# Altium PCB ELOP_V0.90.pcbdoc (part 1 of 2)
Units mm, origin at the board's own origin, x right, y up, seen from the top; angles counter-clockwise.
Board outline 80 x 80.13 mm, 4 copper layers (Top Layer, Mid-Layer 1, Mid-Layer 2, Bottom Layer); 239 components, 164 nets, 744 pads, 242 vias.
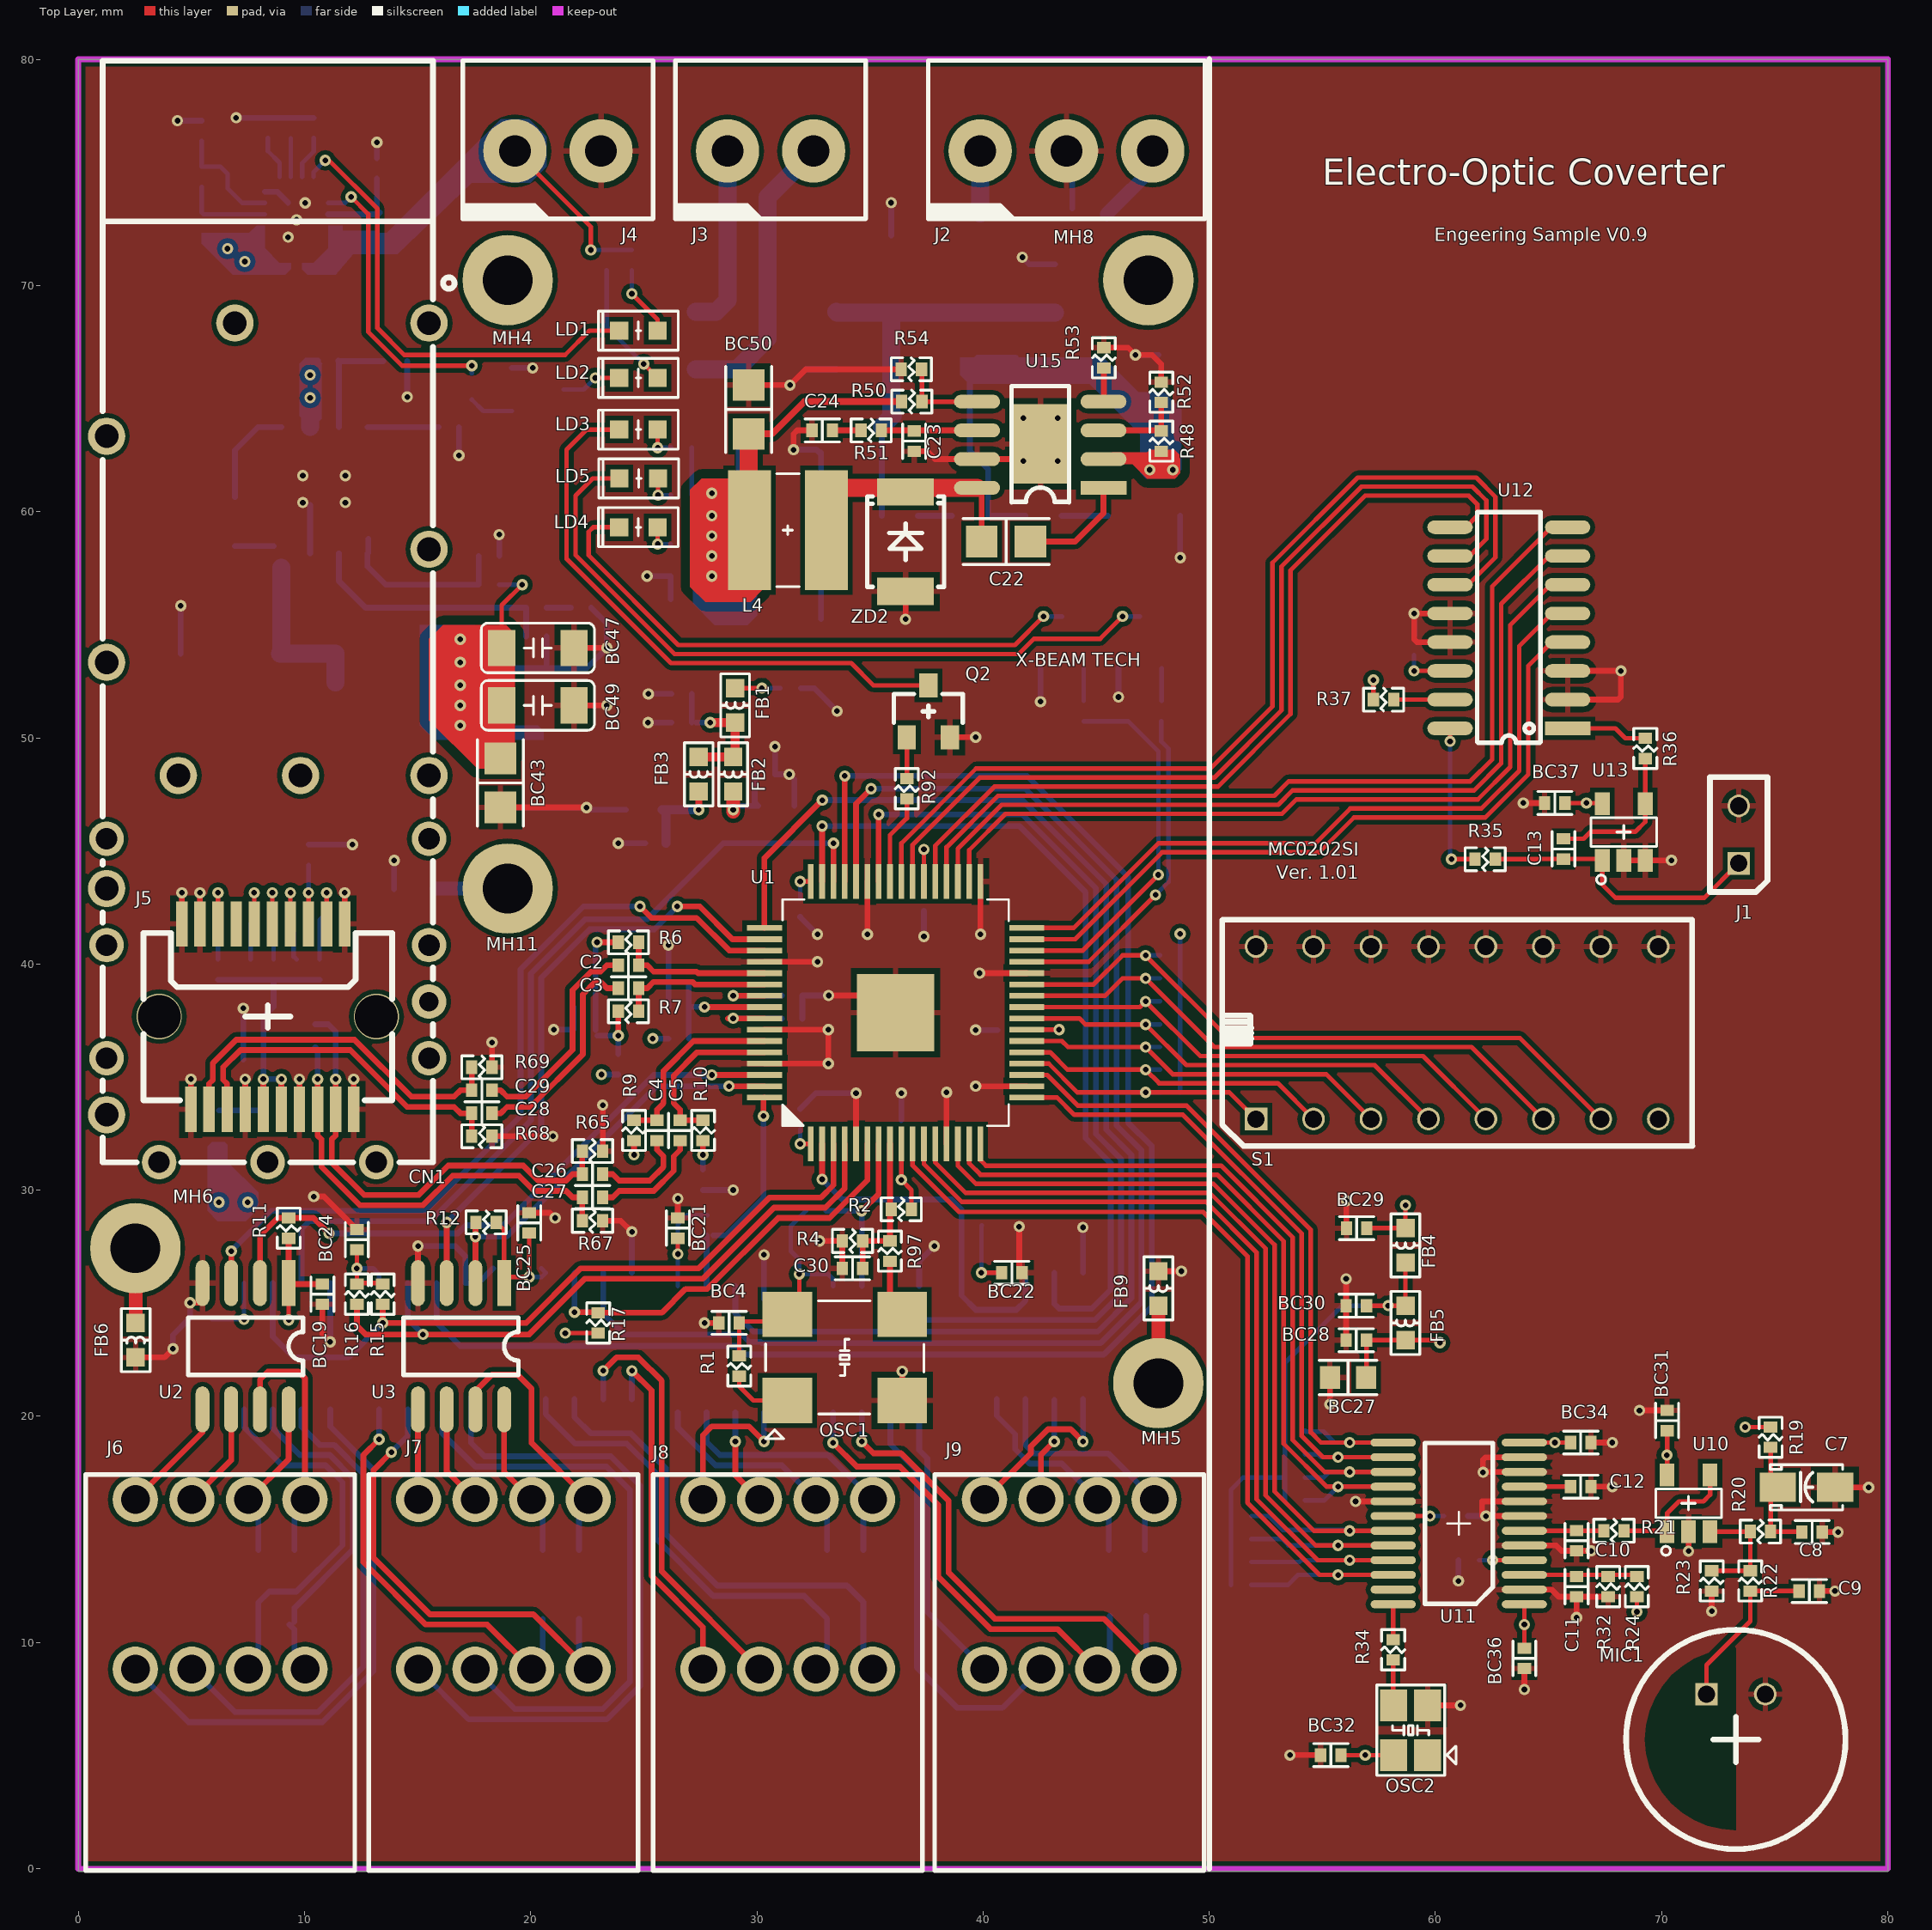
[diagram p0: Top Layer view]
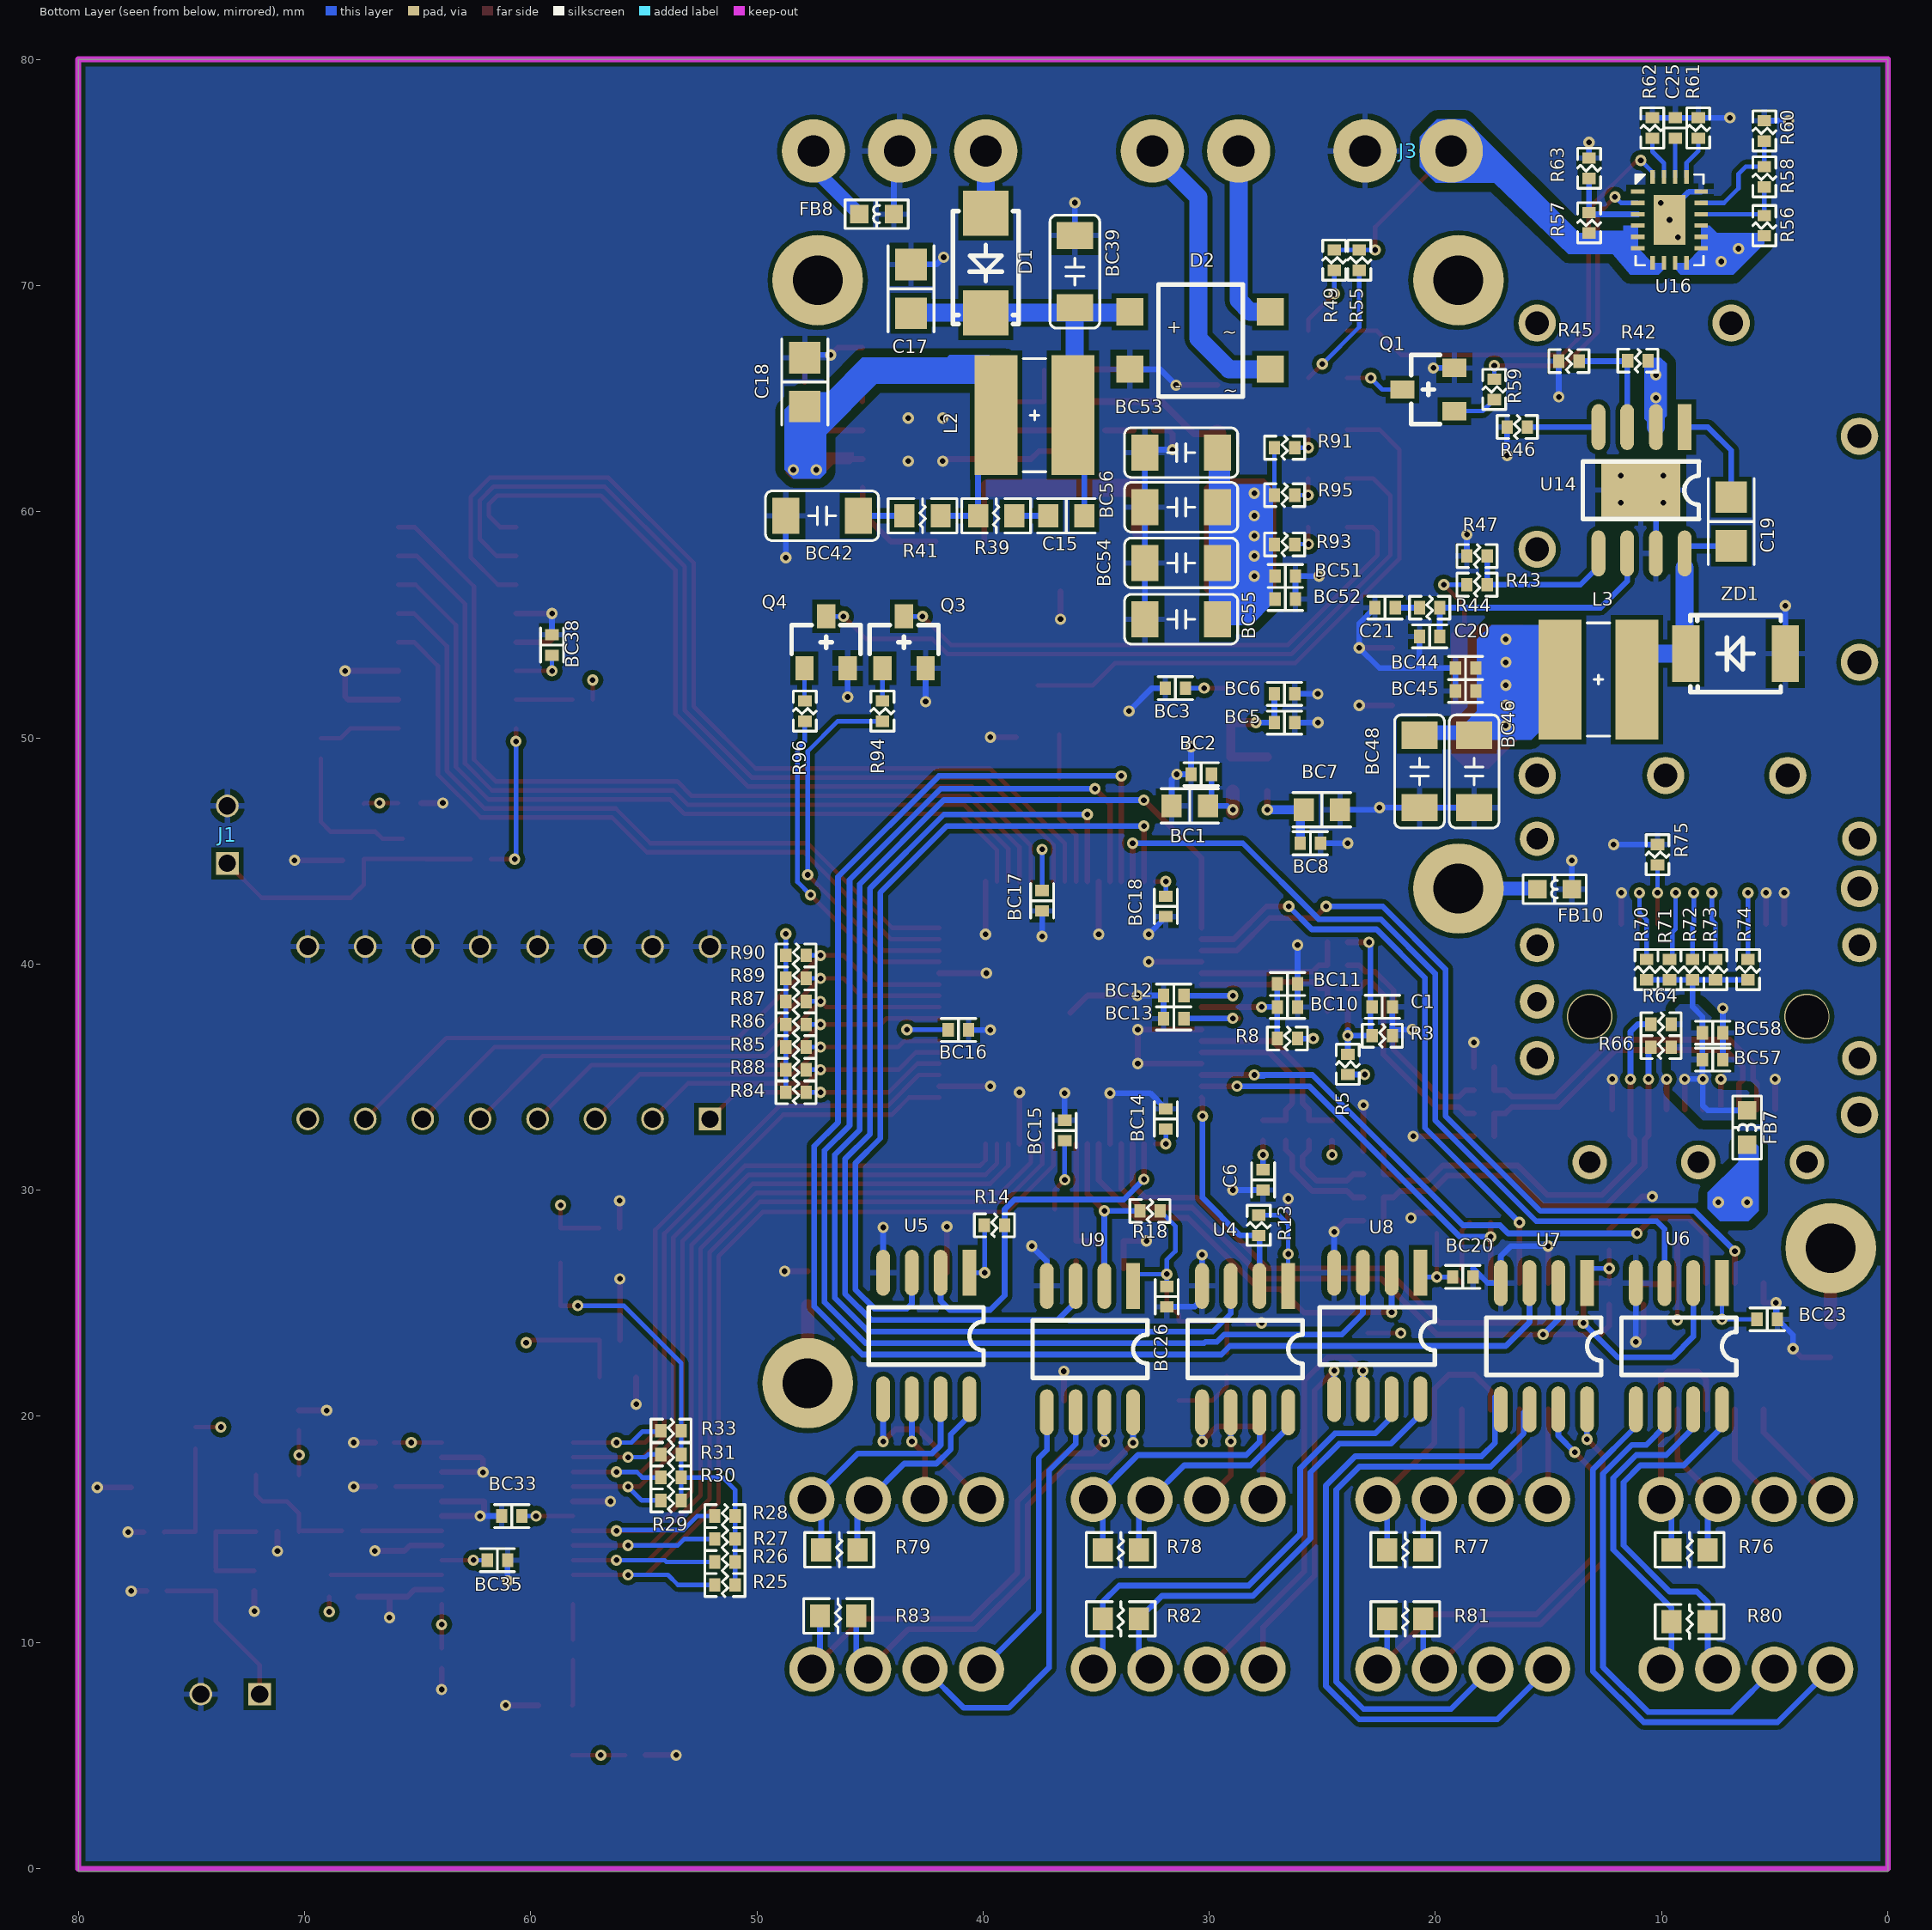
[diagram p1: Bottom Layer view, seen from below]
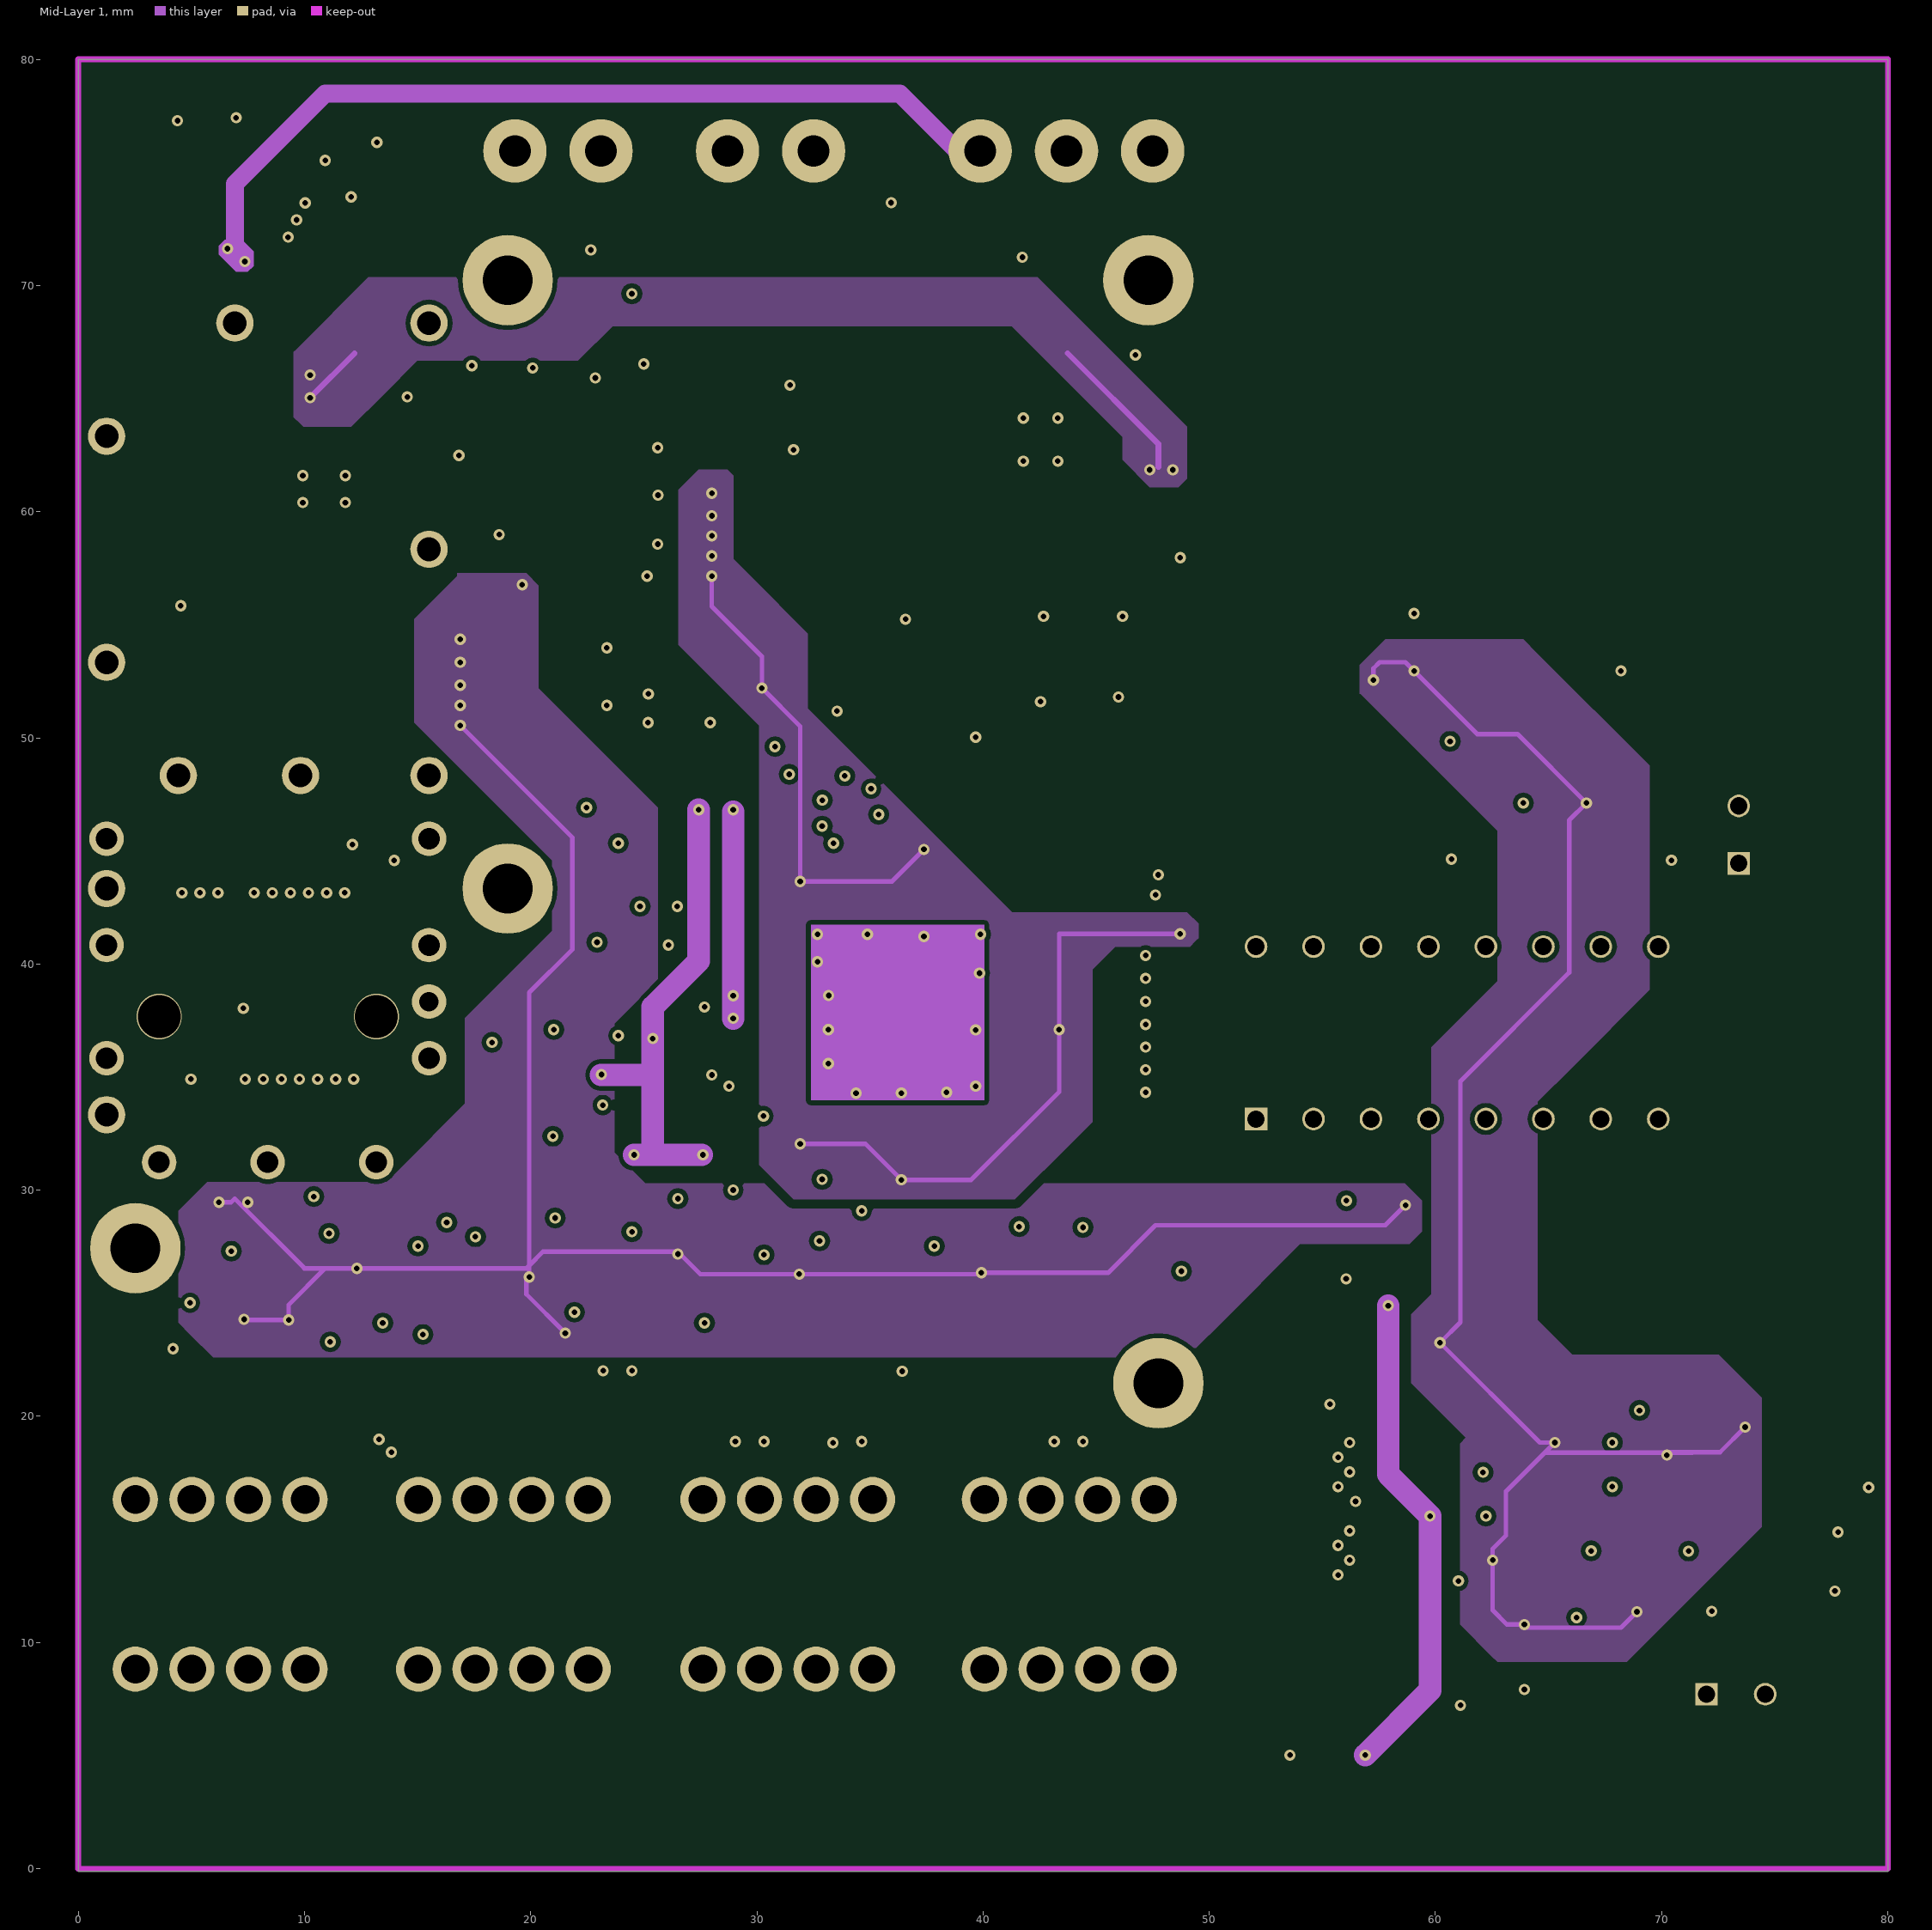
[diagram p2: Mid-Layer 1]
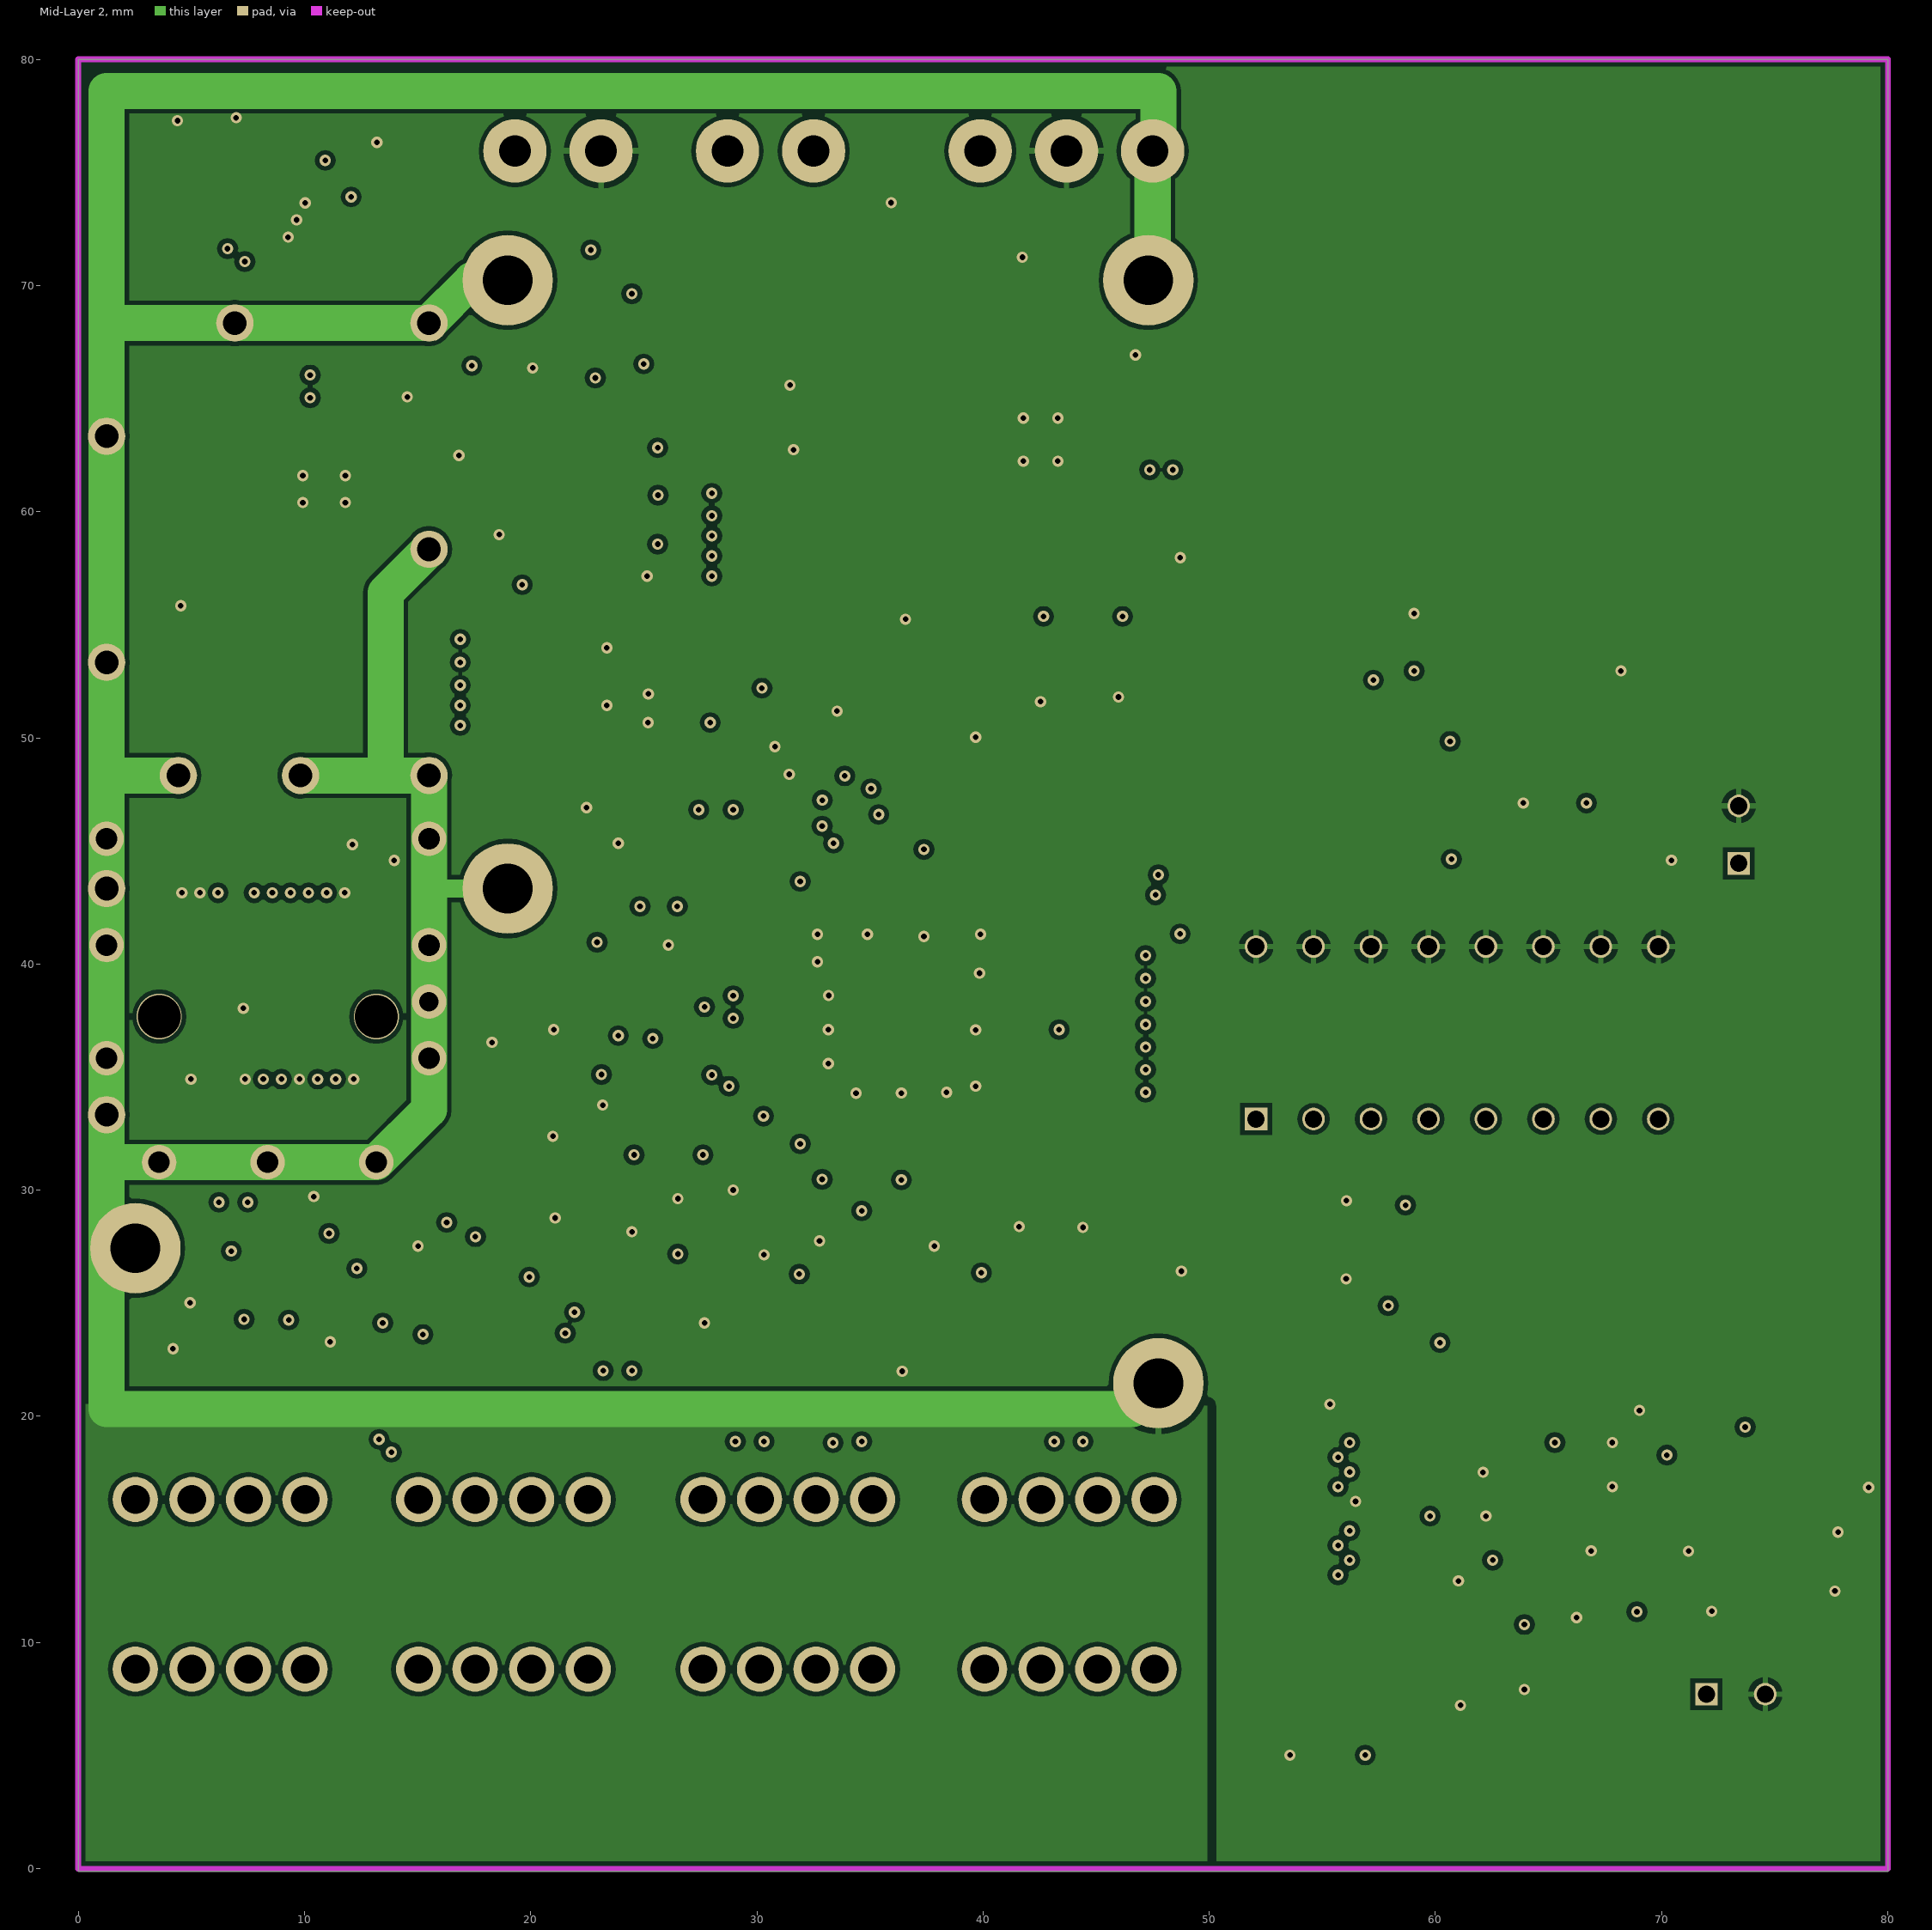
[diagram p3: Mid-Layer 2]

## Layer stack, top to bottom
Top Solder: solder mask 0.0102, Solder Resist, Dk 3.5
Top Layer: signal copper 0.0356
Dielectric1: dielectric 0.32, FR-4, Dk 4.8
Mid-Layer 1: signal copper 0.0356
Dielectric2: dielectric 0.32, FR-4, Dk 4.8
Mid-Layer 2: signal copper 0.0356
Dielectric3: dielectric 0.32, FR-4, Dk 4.8
Bottom Layer: signal copper 0.0356
Bottom Solder: solder mask 0.0102, Solder Resist, Dk 3.5

## Board outline
0,-0.127 80,-0.127 80,80 0,80

## Design rules (kind name [scope] priority, off if disabled: settings)
Clearance Clearance_2 [WithinRoom('RoomDefinition') vs IsTrack] p1: gap=0.1
Clearance Clearance_5 [isVia vs isRegion] p2: gap=0.2
Clearance Clearance_4 [isRegion vs IsRegion] p3: gap=0.4
Clearance Clearance_1 [isVia] p4: gap=0.1
Clearance [All] p5: gap=0.2
ComponentClearance ComponentClearance_2 [HasFootPrint('RS-1005') or HasFootPrint('CS-1005') vs HasFootPrint('RS-1005') or HasFootPrint('CS-1005')] p1: gap=0 collisioncheckmode=3 verticalgap=0 showdistances=FALSE
ComponentClearance ComponentClearance_1 [InComponent('CN1') vs InComponent('J5')] p2: gap=0 collisioncheckmode=3 verticalgap=0 showdistances=FALSE
ComponentClearance [All] p3: gap=0 collisioncheckmode=3 verticalgap=0.1 showdistances=FALSE
DiffPairsRouting [All] p1: maxlimit=0.254 minlimit=0.2 mostfreqgap=0.2 toplayer_minwidth=0.127 toplayer_maxwidth=0.381 toplayer_prefwidth=0.2 midlayer1_minwidth=0.127 midlayer1_maxwidth=0.381 midlayer1_prefwidth=0.2 midlayer2_minwidth=0.127 midlayer2_maxwidth=0.381 midlayer2_prefwidth=0.2 bottomlayer_minwidth=0.127 bottomlayer_maxwidth=0.381 bottomlayer_prefwidth=0.2 maxuncoupledlength=12.7
HoleSize [All] p1: absolutevalues=TRUE maxlimit=30 minlimit=0.025 maxpercent=80.000 minpercent=20.000
MinimumSolderMaskSliver MinimumSolderMaskSliver_3 [WithinRoom('RoomDefinition') vs WithinRoom('RoomDefinition')] p1: minsoldermaskwidth=0.04
MinimumSolderMaskSliver MinimumSolderMaskSliver_2 [isVia vs isVia] p2: minsoldermaskwidth=0.05
MinimumSolderMaskSliver MinimumSolderMaskSliver_1 [IsPad vs isPad] p3: minsoldermaskwidth=0.05
MinimumSolderMaskSliver [All] p4: minsoldermaskwidth=0.1
PolygonConnect PolygonConnect_1 [isVia] p1: connectstyle=Direct reliefconductorwidth=0.254 reliefentries=4 polygonreliefangle="90 Angle" airgapwidth=0.254
PolygonConnect [All] p2: connectstyle=Relief reliefconductorwidth=0.254 reliefentries=4 polygonreliefangle="90 Angle" airgapwidth=0.254
RoomDefinition [InComponentClass('Components Class 1')] p1: confinementstyle=ConfineIn formatcopy=TRUE lockcomponents=FALSE outline 29.337,44.577 42.926,44.577 42.926,31.083 29.337,31.083
RoutingVias [All] p1: holewidth=0.25 width=0.5 viastyle="Through Hole" minholewidth=0.25 minwidth=0.5 maxholewidth=0.25 maxwidth=0.5
SilkToSilkClearance [All] p1: silktosilkclearance=0.01
SilkToSolderMaskClearance [IsPad] p1: minsilkscreentomaskgap=0 clearancetoexposedcopper=TRUE
SolderMaskExpansion [All] p1: expansion=0.102
Width Width_2 [InNet('AGND')] p1: maxlimit=6 minlimit=0.254 preferedwidth=0.254
Width Width_1 [InNetClass('ETH')] p2: maxlimit=0.2 minlimit=0.127 preferedwidth=0.178
Width [All] p3: maxlimit=1 minlimit=0.127 preferedwidth=0.2
23 further rules are at their usual default settings.

## Classes and differential pairs
component class "Components Class 1": BC12 BC13 BC14 BC15 BC16 BC17 BC18
differential pair D_R422TX7: +R422TX_P7 -R422TX_N7
differential pair D_R422TX6: +R422TX_P6 -R422TX_N6
differential pair D_R422TX5: +R422TX_P5 -R422TX_N5
differential pair D_R422TX4: +R422TX_P4 -R422TX_N4
differential pair D_R422TX3: +R422TX_P3 -R422TX_N3
differential pair D_R422TX2: +R422TX_P2 -R422TX_N2
differential pair D_R422TX1: +R422TX_P1 -R422TX_N1
differential pair D_R422TX0: +R422TX_P0 -R422TX_N0
differential pair D_R422RX7: +R422RX_P7 -R422RX_N7
differential pair D_R422RX6: +R422RX_P6 -R422RX_N6
differential pair D_R422RX5: +R422RX_P5 -R422RX_N5
differential pair D_R422RX4: +R422RX_P4 -R422RX_N4
differential pair D_R422RX3: +R422RX_P3 -R422RX_N3
differential pair D_R422RX2: +R422RX_P2 -R422RX_N2
differential pair D_R422RX1: +R422RX_P1 -R422RX_N1
differential pair D_R422RX0: +R422RX_P0 -R422RX_N0
differential pair D_HSOX: +HSOX_P -HSOX_N
differential pair D_HSO: +HSO_P -HSO_N
differential pair D_HSIX: +HSIX_P -HSIX_N
differential pair D_HSI: +HSI_P -HSI_N
differential pair D_SFP0_TX: +SFP0_TX_P -SFP0_TX_N
differential pair D_SFP0_RX: +SFP0_RX_P -SFP0_RX_N

## Components (designator, comment, footprint, x,y, rotation, side; value= is the part's Value field where it differs from the comment)
BC1 "4.7uF" CS-1608#1 30.861,46.99 r0 bottom
BC2 "0.1uF" CS-1005#1 30.353,48.387 r0 bottom
BC3 "0.1uF" CS-1005#1 31.496,52.197 r0 bottom
BC4 "0.1uF" CS-1005#1 28.771,24.13 r180 top
BC5 "0.1uF" CS-1005#1 26.67,50.673 r180 bottom
BC6 "0.1uF" CS-1005#1 26.67,51.943 r180 bottom
BC7 "4.7uF" CS-1608#2 25.019,46.818 r0 bottom
BC8 "0.1uF" CS-1005#1 25.527,45.339 r180 bottom
BC10 "10nF" CS-1005#1 26.543,38.1 r180 bottom
BC11 "0.1uF" CS-1005#1 26.543,39.116 r180 bottom
BC12 "0.1uF" CS-1005#1 31.565,38.608 r0 bottom
BC13 "0.1uF" CS-1005#1 31.565,37.583 r0 bottom
BC14 "0.1uF" CS-1005#1 31.919,33.147 r90 bottom
BC15 "0.1uF" CS-1005#1 36.391,32.639 r90 bottom
BC16 "0.1uF" CS-1005#1 41.09,37.084 r180 bottom
BC17 "0.1uF" CS-1005#1 37.387,42.799 r270 bottom
BC18 "0.1uF" CS-1005#1 31.919,42.545 r270 bottom
BC19 "0.1uF" CS-1005#1 10.795,25.4 r270 top
BC20 "0.1uF" CS-1005#1 18.789,26.162 r180 bottom
BC21 "0.1uF" CS-1005#1 26.509,28.321 r90 top
BC22 "0.1uF" CS-1005#1 41.275,26.348 r0 top
BC23 "0.1uF" CS-1005#1 5.334,24.291 r180 bottom
BC24 "0.1uF" CS-1005#1 12.319,27.813 r90 top
BC25 "0.1uF" CS-1005#1 19.939,28.551 r90 top
BC26 "0.1uF" CS-1005#1 31.877,25.295 r270 bottom
BC27 "4.7uF" CS-1608#2 56.134,21.717 r0 top
BC28 "0.1uF" CS-1005#1 56.501,23.368 r180 top
BC29 "0.1uF" CS-1005#1 56.515,28.321 r180 top
BC30 "0.1uF" CS-1005#1 56.501,24.892 r180 top
BC31 "0.1uF" CS-1005#1 70.241,19.812 r90 top
BC32 "0.1uF" CS-1005#1 55.372,5.022 r180 top
BC33 "0.1uF" CS-1005#1 60.833,15.591 r0 bottom
BC34 "0.1uF" CS-1005#1 66.421,18.841 r0 top
BC35 "0.1uF" CS-1005#1 61.468,13.641 r180 bottom
BC36 "0.1uF" CS-1005#1 63.931,9.299 r270 top
BC37 "0.1uF" CS-1005#1 65.278,47.117 r180 top
BC38 "0.1uF" CS-1005#1 59.055,54.102 r90 bottom
BC39 "4.7uF/100V" CS-3216#1 35.941,70.612 r90 bottom
BC42 "4.7uF/100V" CS-3216#2 47.117,59.817 r180 bottom
BC43 "10uF" CS-2012 18.669,48.006 r270 top
BC44 "0.1uF" CS-1005#1 18.669,53.086 r0 bottom
BC45 "10nF" CS-1005#2 18.669,52.07 r180 bottom
BC46 "22uF" CS-3216#1 18.288,48.514 r270 bottom
BC47 "22uF" CS-3216#1 20.32,53.975 r0 top
BC48 "22uF" CS-3216#2 20.706,48.514 r90 bottom
BC49 "22uF" CS-3216#2 20.32,51.435 r180 top
BC50 "10uF" CS-2012 29.642,64.516 r90 top
BC51 "0.1uF" CS-1005#1 26.64,57.15 r180 bottom
BC52 "10nF" CS-1005#1 26.64,56.134 r180 bottom
BC53 "22uF" CS-3216#1 31.242,62.611 r0 bottom
BC54 "22uF" CS-3216#1 31.242,57.734 r0 bottom
BC55 "22uF" CS-3216#1 31.242,55.245 r0 bottom
BC56 "22uF" CS-3216#1 31.242,60.198 r0 bottom
BC57 "0.1uF" CS-1005#1 7.747,35.77 r0 bottom
BC58 "1uF" CS-1005#1 7.747,36.957 r0 bottom
C1 "10nF" CS-1005#1 22.352,38.107 r180 bottom
C2 "10nF" CS-1005#1 24.326,39.944 r180 top
C3 "10nF" CS-1005#1 24.326,38.928 r180 top
C4 "10nF" CS-1005#1 25.588,32.639 r270 top
C5 "10nF" CS-1005#1 26.612,32.639 r270 top
C6 "10nF" CS-1005#1 27.62,30.456 r270 bottom
C7 "22uF" CTS-3216 76.398,16.859 r0 top
C8 "0.1uF" CS-1005#1 76.652,14.885 r0 top
C9 "33pF" CS-1005#1 76.525,12.276 r0 top
C10 "3.3nF" CS-1005#1 66.238,14.504 r270 top
C11 "0.1uF" CS-1005#1 66.238,12.472 r90 top
C12 "0.1uF" CS-1005#1 66.421,16.891 r180 top
C13 "10pF" CS-1005#1 65.659,45.085 r90 top
C15 "0.1uF" CS-1608#1 36.322,59.817 r0 bottom
C17 "0.1uF//100V" CS-2012 43.18,69.85 r90 bottom
C18 "0.1uF//100V" CS-2012 47.879,65.728 r90 bottom
C19 "0.1uF//100V" CS-2012 6.927,59.563 r270 bottom
C20 "47pF" CS-1005#1 20.256,54.483 r180 bottom
C21 "4.7nF" CS-1005#1 22.225,55.753 r180 bottom
C22 "0.1uF//100V" CS-2012 41.021,58.674 r180 top
C23 "47pF" CS-1005#1 36.957,63.119 r90 top
C24 "4.7nF" CS-1005#1 32.893,63.593 r0 top
C25 "1.5nF" CS-1005#1 9.398,76.963 r270 bottom
C26 "0.1uF" CS-1005#2 22.737,30.71 r0 top
C27 "0.1uF" CS-1005#2 22.737,29.686 r0 top
C28 "0.1uF" CS-1005#1 17.847,33.401 r180 top
C29 "0.1uF" CS-1005#1 17.847,34.417 r180 top
C30 "15pF" CS-1005#1 34.232,26.543 r180 top
CN1 "TH_HC-SFP-01L" TH_HC-SFP-01L 8.382,49.786 r180 top
D1 "RB051L-40" SOD-106 39.878,70.993 r270 bottom
D2 "MB6S" MB2S 30.48,67.564 r90 bottom
FB1 "600" LS-1608 29.038,51.435 r270 top
FB2 "600" LS-1608 28.956,48.387 r270 top
FB3 "600" LS-1608 27.432,48.387 r270 top
FB4 "600" LS-1608 58.674,27.559 r270 top
FB5 "600" LS-1608 58.674,24.13 r270 top
FB6 "600" LS-1608 2.54,23.368 r90 top
FB7 "600" LS-1608 6.223,32.768 r90 bottom
FB8 "600" LS-1608 44.704,73.152 r0 bottom
FB9 "600" LS-1608 47.752,25.654 r270 top
FB10 "600" LS-1608 14.732,43.307 r0 bottom
J1 "Header_2.54_2p" Header_2.54_2p 73.406,44.45 r270 bottom
J2 "KF2EDGR-3.81-3P" KF2EDGV-3.81-3P 39.878,75.946 r0 top
J3 "CON 2P" KF2EDGV-3.81-2P#1 19.304,75.946 r180 bottom
J4 "CON 2P" KF2EDGV-3.81-2P#2 28.702,75.946 r0 top
J5 "KSP20LG154" KSP20LG154 8.382,37.674 r180 top
J6 "KF2EDGRH-2.5-4pX2" KF2EDGRH-2.5-4PX2 6.277,12.573 r0 top
J7 "KF2EDGRH-2.5-4pX2" KF2EDGRH-2.5-4PX2 18.796,12.573 r0 top
J8 "KF2EDGRH-2.5-4pX2" KF2EDGRH-2.5-4PX2 31.369,12.573 r0 top
J9 "KF2EDGRH-2.5-4pX2" KF2EDGRH-2.5-4PX2 43.815,12.573 r0 top
L2 "CDRH4D28-100" CDRH4D28NP 37.719,64.262 r90 bottom
L3 "CDRH4D28NP-7R4NC" CDRH4D28NP 12.793,52.578 r90 bottom
L4 "CDRH4D28NP-7R4NC" CDRH4D28NP 31.369,59.182 r90 top
LD1 "LED" LED1608 24.765,68.003 r0 top
LD2 "LED" LED1608 24.765,65.913 r0 top
LD3 "LED" LED1608 24.765,63.627 r0 top
LD4 "LED" LED1608 24.765,59.309 r0 top
LD5 "LED" LED1608 24.781,61.468 r0 top
MH4 "4.04pi" VA-2.2#1 18.986,70.231 r0 top
MH5 "4.04pi" VA-2.2#1 47.752,21.463 r0 top
MH6 "4.04pi" VA-2.2#1 2.527,27.432 r0 top
MH8 "4.04pi" VA-2.2#2 47.498,70.231 r0 top
MH11 "4.04pi" VA-2.2#1 18.986,43.336 r0 top
MIC1 "MIC9750" MIC9767 73.279,5.715 r0 top
OSC1 "SiT8008BI-82-25E-62.500000" SX7050 33.887,22.606 r180 top
OSC2 "25Mhz-SX32-3.3V" SX-32 58.906,6.122 r270 top
Q1 "MMBT6427/SOT-23" SOT-23 20.32,65.405 r0 bottom
Q2 "MMBT6427/SOT-23" SOT-23 37.587,51.181 r90 top
Q3 "MMBT6427/SOT-23" SOT-23 43.488,54.229 r90 bottom
Q4 "MMBT6427/SOT-23" SOT-23 46.935,54.229 r90 bottom
R1 "1K" RS-1005#1 29.225,22.225 r270 top
R2 "10K//NC" RS-1005#1 36.387,29.153 r180 top
R3 "825" RS-1005#1 22.352,36.83 r180 bottom
R4 "49.9" RS-1005#1 34.232,27.755 r180 top
R5 "200" RS-1005#1 23.876,35.562 r90 bottom
R6 "49.9" RS-1005#1 24.326,40.96 r180 top
R7 "49.9" RS-1005#1 24.326,37.912 r0 top
R8 "100" RS-1005#1 26.543,36.703 r180 bottom
R9 "49.9" RS-1005#1 24.572,32.639 r270 top
R10 "49.9" RS-1005#1 27.62,32.639 r90 top
R11 "10K" RS-1005#1 9.305,28.321 r270 top
R12 "10K" RS-1005#1 18.034,28.575 r0 top
R13 "10K" RS-1005#1 27.813,28.448 r90 bottom
R14 "10K" RS-1005#1 39.497,28.448 r0 bottom
R15 "10K" RS-1005#1 13.462,25.4 r90 top
R16 "10K" RS-1005#1 12.319,25.4 r90 top
R17 "10K" RS-1005#1 22.987,24.13 r270 top
R18 "10K" RS-1005#1 32.619,29.083 r180 bottom
R19 "4.7K" RS-1005#1 74.816,19.076 r90 top
R20 "2K" RS-1005#1 74.366,14.905 r0 top
R21 "500" RS-1005#1 67.889,14.941 r0 top
R22 "10" RS-1005#1 73.916,12.726 r270 top
R23 "10K" RS-1005#1 72.213,12.726 r90 top
R24 "110" RS-1005#1 68.905,12.472 r270 top
R25 "10K" RS-1005#1 51.411,12.545 r0 bottom
R26 "10K" RS-1005#1 51.411,13.561 r0 bottom
R27 "10K" RS-1005#1 51.411,14.577 r0 bottom
R28 "10K" RS-1005#1 51.411,15.593 r0 bottom
R29 "10K" RS-1005#1 53.792,16.282 r0 bottom
R30 "10K" RS-1005#1 53.792,17.298 r0 bottom
R31 "10K" RS-1005#1 53.792,18.314 r0 bottom
R32 "110" RS-1005#1 67.635,12.472 r90 top
R33 "10K" RS-1005#1 53.792,19.364 r0 bottom
R34 "10" RS-1005#1 58.131,9.678 r90 top
R35 "1K" RS-1005#1 62.201,44.633 r180 top
R36 "0" RS-1005#1 69.276,49.53 r90 top
R37 "2K" RS-1005#1 57.706,51.689 r0 top
R39 "47" RS-1608 39.419,59.817 r180 bottom
R41 "0.47" RS-1608 42.672,59.817 r180 bottom
R42 "30K" RS-1005#1 11.052,66.675 r0 bottom
R43 "32.4K_F" RS-1005#1 18.161,56.769 r180 bottom
R44 "16.9K" RS-1005#1 20.256,55.753 r0 bottom
R45 "4.7K" RS-1005#1 14.097,66.654 r0 bottom
R46 "243K" RS-1005#1 16.383,63.74 r0 bottom
R47 "10.2K_F" RS-1005#1 18.161,58.039 r0 bottom
R48 "30K" RS-1005#1 47.879,63.119 r90 top
R49 "4.7K" RS-1005#1 24.473,71.12 r270 bottom
R50 "32.4K_F" RS-1005#1 36.85,64.863 r0 top
R51 "16.9K" RS-1005#1 35.052,63.593 r180 top
R52 "4.7K" RS-1005#1 47.879,65.278 r90 top
R53 "243K" RS-1005#1 45.339,66.802 r90 top
R54 "15K_F" RS-1005#1 36.83,66.294 r180 top
R55 "4.7K" RS-1005#1 23.368,71.12 r270 bottom
R56 "475K" RS-1005#1 5.461,72.644 r90 bottom
R57 "475K" RS-1005#1 13.208,72.771 r90 bottom
R58 "16.7K" RS-1005#1 5.461,74.804 r90 bottom
R59 "1K" RS-1005#1 17.399,65.405 r270 bottom
R60 "31.2K" RS-1005#1 5.461,76.836 r90 bottom
R61 "17,8K" RS-1005#1 8.382,76.963 r90 bottom
R62 "19.1K" RS-1005#1 10.414,76.963 r90 bottom
R63 "47K" RS-1005#1 13.208,75.185 r90 bottom
R64 "10K" RS-1005#1 10.027,37.338 r180 bottom
R65 "10K" RS-1005#1 22.737,31.726 r180 top
R66 "10K" RS-1005#1 10.027,36.322 r180 bottom
R67 "10K" RS-1005#1 22.737,28.649 r180 top
R68 "10K" RS-1005#1 17.847,32.385 r180 top
R69 "10K" RS-1005#1 17.847,35.433 r180 top
R70 "10K" RS-1005#1 10.668,39.753 r270 bottom
R71 "10K" RS-1005#1 9.652,39.753 r270 bottom
R72 "10K" RS-1005#1 8.636,39.753 r270 bottom
R73 "10K" RS-1005#1 7.62,39.753 r270 bottom
R74 "10K" RS-1005#1 6.182,39.753 r270 bottom
R75 "1K" RS-1005#1 10.182,44.831 r270 bottom
R76 "120" RS-1608 8.763,14.097 r180 bottom
R77 "120" RS-1608 21.336,14.097 r180 bottom
R78 "120" RS-1608 33.909,14.097 r180 bottom
R79 "120" RS-1608 46.355,14.097 r180 bottom
R80 "120" RS-1608 8.763,10.922 r180 bottom
R81 "120" RS-1608 21.336,11.049 r180 bottom
R82 "120" RS-1608 33.909,11.049 r180 bottom
R83 "120" RS-1608 46.41,11.176 r180 bottom
R84 "10K" RS-1005#2 48.265,34.327 r0 bottom
R85 "10K" RS-1005#2 48.265,36.327 r0 bottom
R86 "10K" RS-1005#1 48.265,37.327 r180 bottom
R87 "10K" RS-1005#1 48.265,38.347 r180 bottom
R88 "10K" RS-1005#1 48.265,35.327 r180 bottom
R89 "10K" RS-1005#1 48.265,39.363 r180 bottom
R90 "10K" RS-1005#1 48.265,40.379 r180 bottom
R91 "4.7K" RS-1005#1 26.67,62.827 r180 bottom
R92 "1K" RS-1005#1 36.633,47.752 r90 top
R93 "4.7K" RS-1005#1 26.67,58.547 r180 bottom
R94 "1K" RS-1005#1 44.447,51.181 r90 bottom
R95 "4.7K" RS-1005#1 26.67,60.728 r180 bottom
R96 "1K" RS-1005#1 47.879,51.181 r90 bottom
R97 "33" RS-1005#1 35.883,27.305 r90 top
S1 "SW DIP-8" DIP_SW_8C 52.07,33.147 r0 top
U1 "TLK1501RCP" PQFP-G64 36.137,37.846 r90 top
U2 "MAX3490CSA" SOIC-8#1 7.366,23.114 r180 top
U3 "MAX3490CSA" SOIC-8#2 16.891,23.114 r0 top
U4 "MAX3490CSA" SOIC-8#2 28.448,22.987 r180 bottom
U5 "MAX3490CSA" SOIC-8#1 42.545,23.568 r0 bottom
U6 "MAX3490CSA" SOIC-8#1 9.271,23.114 r0 bottom
U7 "MAX3490CSA" SOIC-8#1 15.24,23.114 r0 bottom
U8 "MAX3490CSA" SOIC-8#1 22.606,23.568 r0 bottom
U9 "MAX3490CSA" SOIC-8#1 35.306,22.987 r0 bottom
U10 "OPA340NA" SOT23-5 71.191,16.155 r0 top
U11 "AD08060" TSSOP-24 61.031,15.266 r180 top
U12 "TLC7524" SOP-16 63.246,54.864 r270 top
U13 "OPA340NA" SOT23-5 68.326,45.833 r0 top
U14 "TPS54560" SOIC-8E 10.922,60.96 r0 bottom
U15 "TPS54560" SOIC-8E 42.545,62.992 r90 top
U16 "TPS25940L" WQFN20-4x3 9.652,72.899 r270 bottom
ZD1 "PMEG6045ETP" SOD-128 6.731,53.721 r0 bottom
ZD2 "PMEG6045ETP" SOD-128 36.576,58.674 r90 top

## Footprints (in the part's own frame and the unit in brackets; to place one, negate y for a bottom-side part, rotate by r counter-clockwise, add the part's x,y. Pads: shape width x height; smd on the part's side, far side on the other; paste and mask are expansions set on the pad)
CDRH4D28NP [mm]
  rect 5.3x1.9 smd: 1(0,-1.7) 2(0,1.7)
  silkscreen extent -2.5,-0.5 2.5,0.5
CS-1005#1 [mm]
  rect 0.5x0.6 smd: 1(-0.45,0) 2(0.45,0)
  silkscreen extent -0.76,-0.51 0.76,0.51
CS-1005#2 [mm]
  rect 0.5x0.6 smd: 1(0.45,0) 2(-0.45,0)
  silkscreen extent -0.76,-0.51 0.76,0.51
CS-1608#1 [mil]
  rect 35x40 smd: 1(-31.5,0) 2(31.5,0)
  silkscreen extent -50,-30 50,30
CS-1608#2 [mil]
  rect 35x40 smd: 1(31.5,0) 2(-31.5,0)
  silkscreen extent -50,-30 50,30
CS-2012 [mil]
  rect 55x55 smd: 1(-42.5,0) 2(42.5,0)
  silkscreen extent -75,-40 75,40
CS-3216#1 [mm]
  rect 1.2x1.6 smd: 1(-1.6,0) 2(1.6,0)
  silkscreen extent -2.5,-1.1 2.5,1.1
CS-3216#2 [mm]
  rect 1.2x1.6 smd: 1(1.6,0) 2(-1.6,0)
  silkscreen extent -2.5,-1.1 2.5,1.1
CTS-3216 [mil]
  rect 63x51 smd: 1(-50,0) 2(50,0)
  silkscreen extent -63,-39 63,39
DIP_SW_8C [mm]
  rect 1x1 hole 0.762: 1(0,0)
  round 1 hole 0.762: 2(2.54,0) 3(5.08,0) 4(7.62,0) 5(10.16,0) 6(12.7,0) 7(15.24,0) 8(17.78,0) 9(17.78,7.62) 10(15.24,7.62) 11(12.7,7.62) 12(10.16,7.62) 13(7.62,7.62) 14(5.08,7.62) 15(2.54,7.62) 16(0,7.62)
  silkscreen extent -1.5,-1.19 19.3,8.81
Header_2.54_2p [mm]
  rect 1x1 hole 0.762: 1(0,0)
  round 1 hole 0.762: 2(-2.54,0)
KF2EDGRH-2.5-4PX2 [mm]
  round 2 hole 1.27: A1(-3.75,3.75) A2(-1.25,3.75) A3(1.25,3.75) A4(3.75,3.75) B1(-3.75,-3.75) B2(-1.25,-3.75) B3(1.25,-3.75) B4(3.75,-3.75)
  silkscreen extent -5.95,-12.65 5.95,4.85
KF2EDGV-3.81-2P#1 [mm]
  round 2.8 hole 1.4: 1(0,0) 2(-3.81,0)
KF2EDGV-3.81-2P#2 [mm]
  round 2.8 hole 1.4: 1(0,0) 2(3.81,0)
  silkscreen extent -2.3,-3 6.11,4
KF2EDGV-3.81-3P [mm]
  round 2.8 hole 1.4: 1(0,0) 2(3.81,0) 3(7.62,0)
  silkscreen extent -2.3,-3 9.92,4
KSP20LG154 [mm]
  rect 0.5x2 smd paste+0 mask+0.051: 1(-3.4,-4.1) 2(-2.6,-4.1) 3(-1.8,-4.1) 4(-1,-4.1) 5(-0.2,-4.1) 6(0.6,-4.1) 7(1.4,-4.1) 8(2.2,-4.1) 9(3,-4.1) 10(3.8,-4.1) 11(3.4,4.1) 12(2.6,4.1) 13(1.8,4.1) 14(1,4.1) 15(0.2,4.1) 16(-0.6,4.1) 17(-1.4,4.1) 18(-2.2,4.1) 19(-3,4.1) 20(-3.8,4.1)
  silkscreen extent -5.5,-3.7 5.5,3.7
LED1608 [mm]
  rect 0.8x0.8 smd paste+0 mask+0.051: 1(0.851,0) 2(-0.851,0)
  silkscreen extent -1.77,-0.86 1.77,0.86
LS-1608 [mil]
  rect 32x32 smd: 1(-30,0) 2(30,0)
  silkscreen extent -55,-25 55,25
MB2S [mm]
  rect 1.2x1.2 smd: 1(-1.269,-3.173) 2(1.271,-3.173) 3(1.271,3.027) 4(-1.269,3.027)
  silkscreen extent -2.47,-1.96 2.47,1.77
MIC9767 [mm]
  rect 1x1 hole 0.762: 1(-1.3,2)
  round 1 hole 0.762: 2(1.3,2)
  Top Layer pour cut-out: 0,4 -1.736,3.604 -3.127,2.494 -3.9,0.89 -3.9,-0.89 -3.127,-2.494 -1.736,-3.604 0,-4 0,-4
  silkscreen extent -4.85,-4.85 4.85,4.85
PQFP-G64 [mm]
  rect 1.55x0.25 smd: 1(-5.8,3.75) 2(-5.8,3.25) 3(-5.8,2.75) 4(-5.8,2.25) 5(-5.8,1.75) 6(-5.8,1.25) 7(-5.8,0.75) 8(-5.8,0.25) 9(-5.8,-0.25) 10(-5.8,-0.75) 11(-5.8,-1.25) 12(-5.8,-1.75) 13(-5.8,-2.25) 14(-5.8,-2.75) 15(-5.8,-3.25) 16(-5.8,-3.75) 33(5.8,-3.75) 34(5.8,-3.25) 35(5.8,-2.75) 36(5.8,-2.25) 37(5.8,-1.75) 38(5.8,-1.25) 39(5.8,-0.75) 40(5.8,-0.25) 41(5.8,0.25) 42(5.8,0.75) 43(5.8,1.25) 44(5.8,1.75) 45(5.8,2.25) 46(5.8,2.75) 47(5.8,3.25) 48(5.8,3.75)
  rect 0.25x1.55 smd: 17(-3.75,-5.8) 18(-3.25,-5.8) 19(-2.75,-5.8) 20(-2.25,-5.8) 21(-1.75,-5.8) 22(-1.25,-5.8) 23(-0.75,-5.8) 24(-0.25,-5.8) 25(0.25,-5.8) 26(0.75,-5.8) 27(1.25,-5.8) 28(1.75,-5.8) 29(2.25,-5.8) 30(2.75,-5.8) 31(3.25,-5.8) 32(3.75,-5.8) 49(3.75,5.8) 50(3.25,5.8) 51(2.75,5.8) 52(2.25,5.8) 53(1.75,5.8) 54(1.25,5.8) 55(0.75,5.8) 56(0.25,5.8) 57(-0.25,5.8) 58(-0.75,5.8) 59(-1.25,5.8) 60(-1.75,5.8) 61(-2.25,5.8) 62(-2.75,5.8) 63(-3.25,5.8) 64(-3.75,5.8)
  rect 3.42x3.42 smd mask+2.4: 65(0,0)
  silkscreen extent -5,-5 5,5
RS-1005#1 [mm]
  rect 0.5x0.6 smd: 1(-0.45,0) 2(0.45,0)
  silkscreen extent -0.89,-0.51 0.89,0.51
RS-1005#2 [mm]
  rect 0.5x0.6 smd: 1(0.45,0) 2(-0.45,0)
  silkscreen extent -0.89,-0.51 0.89,0.51
RS-1608 [mil]
  rect 35x40 smd: 1(-31.5,0) 2(31.5,0)
  silkscreen extent -60,-30 60,30
SOD-106 [mm]
  rrect0% 2x2 smd: 1(-2.2,0) 2(2.2,0)
  silkscreen extent -2.3,-1.45 2.7,1.45
SOD-128 [mm]
  rrect0% 1.2x2.5 smd: 1(-2.2,0) 2(2.2,0)
  silkscreen extent -2,-1.7 2,1.7
SOIC-8#1 [mil]
  rect 24x80 smd: 1(-76.34,-109.45)
  oval 24x80 smd: 2(-26.34,-109.45) 3(23.66,-109.45) 4(73.66,-109.45) 5(73.66,110.55) 6(23.66,110.55) 7(-26.34,110.55) 8(-76.34,110.55)
  silkscreen extent -101,-49 99,51
SOIC-8#2 [mil]
  rect 24x80 smd: 1(76.34,109.45)
  oval 24x80 smd: 2(26.34,109.45) 3(-23.66,109.45) 4(-73.66,109.45) 5(-73.66,-110.55) 6(-23.66,-110.55) 7(26.34,-110.55) 8(76.34,-110.55)
  silkscreen extent -99,-51 101,49
SOIC-8E [mil]
  rect 24x80 smd: 1(-76.34,-109.45)
  oval 24x80 smd: 2(-26.34,-109.45) 3(23.66,-109.45) 4(73.66,-109.45) 5(73.66,110.55) 6(23.66,110.55) 7(-26.34,110.55) 8(-76.34,110.55)
  rect 138.19x103.15 smd: 9(0,0)
  silkscreen extent -101,-49 101,51
SOP-16 [mm]
  rect 0.6x2 smd: 1(4.445,2.6)
  oval 0.6x2 smd: 2(3.175,2.6) 3(1.905,2.6) 4(0.635,2.6) 5(-0.635,2.6) 6(-1.905,2.6) 7(-3.175,2.6) 8(-4.445,2.6) 9(-4.445,-2.6) 10(-3.175,-2.6) 11(-1.905,-2.6) 12(-0.635,-2.6) 13(0.635,-2.6) 14(1.905,-2.6) 15(3.175,-2.6) 16(4.445,-2.6)
  silkscreen extent -5.12,-1.4 5.08,1.4
SOT23-5 [mm]
  rect 0.65x1.001 smd: 1(-0.95,-1.25) 2(0,-1.25) 3(0.95,-1.25) 4(0.95,1.25) 5(-0.95,1.25)
  silkscreen extent -1.45,-2.3 1.45,0.64
SOT-23 [mil]
  rect 42x32 smd: 1(-45.45,37.75) 2(-45.45,-37.35) 3(44.85,0.2)
  silkscreen extent -20,-60 30,60
SX7050 [mm]
  rect 2.2x2 smd: 1(2.54,1.905) 2(-2.54,1.905) 3(-2.54,-1.905) 4(2.54,-1.905)
  silkscreen extent -3.5,-2.5 3.5,3.6
SX-32 [mm]
  rect 1.4x1.2 smd: 1(1.1,0.75) 2(-1.1,0.75) 3(-1.1,-0.75) 4(1.1,-0.75)
  silkscreen extent -2,-1.5 2,2
TH_HC-SFP-01L [mm]
  round 1.65 hole 1.05 paste+0 mask+0.05: 1(-7.125,-18.55) 2(-7.125,-8.55) 3(-7.125,1.45) 11(7.125,16.45) 14(7.125,6.45) 16(7.125,-3.55) 17(7.125,-13.55) 18(1.455,-18.55) 19(3.955,1.45) 20(-1.445,1.45)
  round 1.524 hole 0.95 paste+0 mask+0.05: 4(-7.125,4.25) 5(-7.125,8.95) 7(-7.125,13.95) 8(-4.795,18.55) 9(0.005,18.55) 10(4.805,18.55) 12(7.125,13.95) 13(7.125,8.95) 15(7.125,4.25)
  round 1.524 hole 0.85 paste+0 mask+0.05: 6(-7.125,11.45)
  silkscreen extent -8.26,-30.15 7.3,18.55
TSSOP-24 [mm] "TSOP, 16-Leads, Body 5x4.4mm, Pitch 0.65mm, IPC Low Density"
  oval 2x0.35 smd: 1(-2.9,3.575) 2(-2.9,2.925) 3(-2.9,2.275) 4(-2.9,1.625) 5(-2.9,0.975) 6(-2.9,0.325) 7(-2.9,-0.325) 8(-2.9,-0.975) 9(-2.9,-1.625) 10(-2.9,-2.275) 11(-2.9,-2.925) 12(-2.9,-3.575) 13(2.9,-3.575) 14(2.9,-2.925) 15(2.9,-2.275) 16(2.9,-1.625) 17(2.9,-0.975) 18(2.9,-0.325) 19(2.9,0.325) 20(2.9,0.975) 21(2.9,1.625) 22(2.9,2.275) 23(2.9,2.925) 24(2.9,3.575)
  silkscreen extent -1.5,-3.56 1.5,3.56
VA-2.2#1 [mm]
  rrect100% 4x4 hole 2.2: 1(0,0)
VA-2.2#2 [mm]
  rrect100% 4x4 hole 2.2: 1(-0.19,0)
WQFN20-4x3 [mm]
  rect 0.2x0.6 smd: 1(-1.25,-1.4) 2(-0.75,-1.4) 3(-0.25,-1.4) 4(0.25,-1.4) 5(0.75,-1.4) 6(1.25,-1.4) 11(1.25,1.4) 12(0.75,1.4) 13(0.25,1.4) 14(-0.25,1.4) 15(-0.75,1.4) 16(-1.25,1.4)
  rect 0.6x0.2 smd: 7(1.9,-0.75) 8(1.9,-0.25) 9(1.9,0.25) 10(1.9,0.75) 17(-1.9,0.75) 18(-1.9,0.25) 19(-1.9,-0.25) 20(-1.9,-0.75)
  rect 2.2x1.4 smd: 21(0,0)
  silkscreen extent -2,-1.5 2,1.5

## Via types
v1: diameter 0.5, hole 0.25, Top Layer to Bottom Layer, 240 vias
v2: diameter 2, hole 1.9, Top Layer to Bottom Layer, 2 vias

## Nets (pads, with @x,y where several pads share a name; then routed paths per layer and width w, separated by ;. In a path a pad name is that pad's centre, name@x,y a point inside that pad or via, vN(x,y) a via of type N, cw(c..) or ccw(c..) an arc to the next point about the centre after c; other vN are vias at no path point)
+2.5V: BC3.1 BC14.1 BC15.1 BC16.1 BC17.1 BC18.1 BC50.1 BC51.1 BC52.1 BC53.1 BC54.1 BC55.1 BC56.1 FB1.1 L4.2 R2.1 R50.1 R84.1 R85.1 R86.1 R87.1 R88.1 R89.1 R90.1 R91.1 R93.1 R95.1 U1.1 U1.9 U1.23 U1.38 U1.48 | length 83.9
  Top Layer w0.2: FB1.1@29.038,52.197 v1(30.226,52.197) ; v1(31.919,32.046) U1.1@32.387,32.046 ; v1(31.919,43.646) U1.48@32.387,43.646 ; U1.9@36.387,32.046 v1(36.387,30.456) 36.837,30.006 R2.1@36.837,29.153 ; U1.38@37.387,43.646 v1(37.387,45.065) ; U1.23@41.937,37.096 v1(43.364,37.096)
  Top Layer w0.3: BC50.1@29.642,63.437 30.67,63.437 32.097,64.863 R50.1@36.4,64.863
  Top Layer w0.8: L4.2@29.642,59.209 BC50.1@29.642,63.437
  Mid-Layer 1 w0.2: v1(28.009,57.15) 28.009,55.811 30.226,53.594 v1(30.226,52.197) 31.919,50.504 v1(31.919,43.646) 35.968,43.646 v1(37.387,45.065) ; v1(31.919,32.046) 34.797,32.046 v1(36.387,30.456) 39.473,30.456 43.364,34.347 v1(43.364,37.096) 43.364,41.345 ; 43.375,41.334 v1(48.715,41.334)
  Bottom Layer w0.2: R95.1@27.12,60.728 R91.1@27.12,62.827 ; BC53.1@29.388,62.357 BC53.1@29.642,62.611 ; v1(30.226,52.197) BC3.1@31.046,52.197 ; v1(31.919,32.046) BC14.1@31.919,32.697 ; BC18.1@31.919,42.895 v1(31.919,43.646) ; v1(36.387,30.456) 36.391,30.46 BC15.1@36.391,32.189 ; BC17.1@37.387,43.249 v1(37.387,45.065) ; BC16.1@41.552,37.096 v1(43.364,37.096) ; R84.1@48.715,34.327 R90.1@48.715,40.379 v1(48.715,41.334)
  other v1: 28.009,58.039 28.009,58.928 28.009,59.817 28.009,60.811
+3.3V: BC4.1 BC19.1 BC20.1 BC21.1 BC22.1 BC23.1 BC24.1 BC25.1 BC26.1 BC29.1 BC43.1 BC44.1 BC45.1 BC46.1 BC47.1 BC48.1 BC49.1 FB4.1 FB7.1 L3.2 OSC1.4 R1.1 R11.2 R12.2 R13.2 R14.2 R15.2 R16.2 R17.2 R18.2 R43.1 U2.1 U3.1 U4.1 U5.1 U6.1 U7.1 U8.1 U9.1 | length 142
  Top Layer w0.2: v1(9.305,24.263) U2.1@9.305,25.894 U2.1@9.349,25.85 ; R16.2@12.319,25.85 R16.2@12.319,25.894 ; BC24.1@12.319,27.363 v1(12.319,26.543) R16.2@12.319,25.894 ; R15.2@13.418,25.894 R16.2@12.319,25.894 ; R12.2@18.484,28.575 18.83,28.229 18.83,26.509 U3.1@18.864,26.543 ; BC47.1@18.72,53.975 18.72,55.861 v1(19.628,56.769) ; U3.1@18.83,25.894 19.098,26.162 v1(19.939,26.162) BC25.1@19.939,28.101 ; v1(21.532,23.68) R17.2@22.987,23.68 ; v1@26.509,27.281 BC21.1@26.509,27.871 ; R1.1@29.221,22.813 29.221,24.199 31.311,24.199 31.347,24.235 OSC1.4@31.347,24.511 31.877,25.041 v1(31.877,26.288) ; v1(39.927,26.348) BC22.1@40.698,26.348 ; BC29.1@56.965,28.321 FB4.1@58.674,28.321 v1(58.674,29.337)
  Top Layer w0.256: U2.1@9.305,25.894 R11.2@9.305,27.871 ; U2.1@9.349,25.85 BC19.1@10.795,25.85
  Mid-Layer 1 w0.2: v1(6.223,29.464) 6.758,29.464 6.919,29.625 10.001,26.543 10.922,26.543 ; v1(7.332,24.291) 7.36,24.263 v1(9.305,24.263) 9.305,24.926 10.922,26.543 ; v1(16.891,50.546) 21.844,45.593 21.844,40.64 19.939,38.735 19.939,26.67 ; v1@19.812,26.162 19.812,25.4 v1(21.532,23.68) ; v1(19.939,26.162) 19.939,26.67 ; v1(58.674,29.337) 57.785,28.448 47.625,28.448 45.525,26.348 v1(39.927,26.348) 39.867,26.288 v1(31.877,26.288) 27.502,26.288 26.509,27.281 20.55,27.281 19.939,26.67 ; 10.922,26.543 v1(12.319,26.543) 19.812,26.543 19.939,26.67
  Bottom Layer w0.2: BC23.1@5.911,24.291 v1(7.332,24.291) U6.1@7.332,25.894 ; v1(6.223,29.464) 6.758,29.464 6.919,29.625 6.223,30.321 FB7.1@6.223,32.006 ; v1(12.319,26.543) 13.046,26.543 13.301,26.288 U7.1@13.301,25.894 ; R43.1@18.611,56.769 v1(19.628,56.769) ; BC20.1@19.366,26.162 v1(19.939,26.162) 20.481,26.162 U8.1@20.667,26.348 U8.1@20.472,26.543 ; U4.1@26.509,25.767 v1(26.509,27.178) 26.509,28.483 26.924,28.898 R13.2@27.813,28.898 ; BC26.1@31.877,25.745 v1(31.877,26.288) ; R18.2@32.169,29.083 31.496,28.41 31.496,27.305 31.877,26.924 v1(31.877,26.288) ; U9.1@33.367,25.767 33.367,26.069 33.147,26.289 33.146,26.288 v1(31.877,26.288) ; R14.2@39.947,28.448 39.927,28.428 v1(39.927,26.348) U5.1@40.606,26.348
  other v1: 7.493,29.464 16.891,51.435 16.891,52.324 16.891,53.34 16.891,54.356
+12V: BC39.1 C15.1 C17.1 D1.2 D2.3 L2.1 | length 18.7
  Bottom Layer w0.254: C15.1@35.522,59.817 L2.1@35.522,63.765
  Bottom Layer w0.8: D2.3@33.507,68.835 33.549,68.793 38.989,68.793 C17.1@43.18,68.793 ; L2.1@35.522,63.765 L2.1@36.019,64.262 35.941,64.34 BC39.1@35.941,68.631
AGND: CN1.1 CN1.2 CN1.3 CN1.4 CN1.5 CN1.6 CN1.7 CN1.8 CN1.9 CN1.10 CN1.11 CN1.12 CN1.13 CN1.14 CN1.15 CN1.16 CN1.17 CN1.18 CN1.19 CN1.20 FB6.2 FB8.2 FB9.2 FB10.2 J2.3 MH4.1 MH5.1 MH6.1 MH8.1 MH11.1 | length 246.5
  Top Layer w0.6: FB6.2@2.54,24.13 MH6.1@2.54,27.419 ; MH5.1@47.752,21.463 FB9.2@47.752,24.892
  Top Layer w1.6: MH6.1@2.527,27.432 MH6.1@2.54,27.419
  Mid-Layer 2 w0.8: 15.507,43.336 MH11.1@18.986,43.336
  Mid-Layer 2 w1.6: 1.333,48.336 CN1.19@4.427,48.336 ; MH6.1@1.524,27.178 1.778,27.432 MH6.1@2.527,27.432 ; CN1.20@9.827,48.336 13.589,48.336 ; CN1.2@15.507,58.336 13.589,56.418 13.589,48.336 ; MH4.1@18.986,70.231 17.402,70.231 CN1.1@15.507,68.336 CN1.18@6.927,68.336 1.327,68.336 1.257,68.266 ; MH8.1@47.498,70.231 J2.3@47.498,75.946 ; MH5.1@47.752,21.463 46.609,20.32 1.257,20.32 1.257,31.115 ; J2.3@47.752,75.946 47.752,78.6 1.257,78.6 1.257,68.266 ; 1.257,31.115 1.378,31.236 CN1.10@3.577,31.236 13.177,31.236 15.507,33.566 CN1.5@15.507,40.836 15.507,43.336 CN1.3@15.507,48.336 13.589,48.336 ; 1.257,31.115 CN1.11@1.257,33.336 1.257,68.266
  Bottom Layer w0.6: FB10.2@15.859,43.336 MH11.1@18.986,43.336 ; FB8.2@45.466,73.152 J2.3@47.752,75.438
  Bottom Layer w1.6: J2.3@47.752,75.438 J2.3@47.752,75.946
DC_CON_IN: D1.1 J2.1 R56.1 U16.9 U16.10 U16.11 U16.12 U16.13 | length 40.3
  Mid-Layer 1 w0.8: 6.927,71.628 6.927,74.491 10.922,78.486 36.322,78.486 J2.1@38.862,75.946
  Bottom Layer w0.8: D1.1@39.878,73.193 J2.1@39.878,75.946
  other v1: 7.366,71.057 6.604,71.628
DC_IN: C18.1 L2.2 R39.1 R41.2 R42.1 R48.1 U14.2 U15.2 | length 26.1
  Top Layer w0.254: U15.2@45.325,62.323 47.533,62.323 R48.1@47.879,62.669
  Mid-Layer 1 w0.254: v1(10.253,65.036) 12.223,67.006 ; 43.738,67.006 47.752,62.992 47.752,61.976
  Bottom Layer w0.254: v1(10.253,65.036) 10.253,66.326 R42.1@10.602,66.675 ; 41.448,66.802 39.751,66.802 39.419,66.47 L2.2@39.419,64.262 39.419,62.689 40.219,61.889 R39.1@40.219,59.817 R41.2@41.872,59.817
  Bottom Layer w0.8: U14.2@10.253,63.74 v1(10.253,65.036)
  other v1: 47.371,61.849 48.387,61.849 10.253,66.04
ENABLE: R86.2 S1.4 U1.24 | length 20.2
  Top Layer w0.2: U1.24@41.937,37.596 44.261,37.596 44.53,37.327 v1(47.186,37.327) 48.986,35.527 57.31,35.527 S1.4@59.69,33.147
  Bottom Layer w0.2: v1(47.186,37.327) R86.2@47.815,37.327
GND: BC1.2 BC2.2 BC3.2 BC4.2 BC5.2 BC6.2 BC7.2 BC8.2 BC10.2 BC11.2 BC12.2 BC13.2 BC14.2 BC15.2 BC16.2 BC17.2 BC18.2 BC19.2 BC20.2 BC21.2 BC22.2 BC23.2 BC24.2 BC25.2 BC26.2 BC27.2 BC28.2 BC29.2 BC30.2 BC31.2 BC32.2 BC33.2 BC34.2 BC35.2 BC36.2 BC37.2 BC38.2 BC39.2 BC42.2 BC43.2 BC44.2 BC45.2 BC46.2 BC47.2 BC48.2 BC49.2 BC50.2 BC51.2 BC52.2 BC53.2 BC54.2 BC55.2 BC56.2 BC57.1 BC58.1 C1.2 C6.2 C7.2 C8.2 C9.2 C10.2 C11.1 C12.1 C17.2 C18.2 C20.1 C21.1 C23.1 C24.1 C25.1 C30.2 D2.4 FB6.1 FB8.1 FB9.1 FB10.1 J1.2 J2.2 J3.2 J5.1 J5.9 J5.10 J5.11 J5.14 J5.17 J5.20 MIC1.2 OSC1.2 OSC2.2 Q1.2 Q2.2 Q3.2 Q4.2 R3.2 R4.2 R23.1 R32.1 R45.2 R46.2 R47.2 R52.2 R53.2 R54.2 R60.2 R61.2 R62.2 R63.2 R65.1 R67.1 R68.1 R69.1 R75.1 S1.9 S1.10 S1.11 S1.12 S1.13 S1.14 S1.15 S1.16 U1.5 U1.13 U1.18 U1.28 U1.33 U1.43 U1.52 U1.58 U1.61 U1.65 U2.4 U3.4 U4.4 U5.4 U6.4 U7.4 U8.4 U9.4 U10.2 U11.2 U11.5 U11.7 U11.8 U11.10 U11.11 U11.17 U12.2 U12.3 U12.12 U12.13 U13.2 U13.3 U14.7 U14.9 U15.7 U15.9 U16.16 U16.21 ZD1.1 ZD2.1 | length 242.1
  Top Layer w0.254: FB6.1@2.54,22.606 3.81,22.606 v1(4.191,22.987) ; J5.10@4.582,41.774 v1(4.582,43.149) ; v1(4.944,25.019) 5.495,25.019 U2.4@5.495,25.894 ; J5.11@4.982,33.575 v1(4.982,34.911) ; J5.9@5.382,41.774 v1(5.382,43.149) ; J5.14@7.382,33.575 v1(7.382,34.911) ; J5.17@9.782,33.575 v1(9.782,34.911) ; v1(10.414,29.718) 10.864,29.718 BC24.2@12.319,28.263 ; BC19.2@10.795,24.95 10.795,23.638 v1(11.142,23.291) ; J5.1@11.782,41.774 v1(11.782,43.149) ; J5.20@12.182,33.575 v1(12.182,34.911) ; U3.4@15.02,25.894 v1(15.02,27.525) ; R68.1@18.297,32.385 v1(20.983,32.385) ; R69.1@18.297,35.433 v1(18.297,36.536) ; BC43.2@18.669,46.927 22.461,46.927 v1(22.473,46.914) ; BC25.2@19.939,29.001 20.852,29.001 v1(21.082,28.771) ; BC49.2@21.92,51.435 v1(23.368,51.435) ; BC47.2@21.92,53.975 v1(23.368,53.975) ; R67.1@23.187,28.649 23.988,28.649 v1(24.477,28.16) ; R65.1@23.187,31.726 v1(23.187,33.762) ; BC21.2@26.509,28.771 v1(26.509,29.625) ; v1(27.686,24.13) BC4.2@28.321,24.13 ; BC50.2@29.642,65.596 v1(31.467,65.596) 32.165,66.294 R54.2@36.38,66.294 ; U1.61@30.337,35.596 v1(33.159,35.596) v1(33.159,37.096) U1.58@30.337,37.096 ; U1.52@30.337,40.096 v1(32.679,40.096) ; v1(31.623,62.738) 31.623,63.432 31.784,63.593 C24.1@32.443,63.593 ; v1(32.773,27.755) R4.2@33.782,27.755 C30.2@33.782,26.543 ; v1(33.176,38.608) 35.375,38.608 U1.65@36.137,37.846 ; U1.5@34.387,32.046 v1(34.387,34.29) ; v1(34.887,41.313) U1.43@34.887,43.646 ; OSC1.2@36.427,20.701 v1(36.427,21.994) ; v1(36.576,55.245) ZD2.1@36.576,56.474 ; C23.1@36.957,62.669 37.534,62.669 37.88,62.323 U15.7@39.737,62.323 U15.9@41.876,62.323 ; U1.13@38.387,32.046 v1(38.387,34.323) ; Q2.2@38.536,50.027 v1(39.673,50.027) ; v1(39.676,34.596) U1.18@41.937,34.596 ; v1(39.848,39.596) U1.28@41.937,39.596 ; v1(39.887,41.314) U1.33@39.887,43.646 ; BC22.2@41.598,26.348 v1(41.598,28.39) ; R53.2@45.339,67.252 46.413,67.252 v1(46.736,66.929) 47.474,66.929 47.879,66.524 R52.2@47.879,65.728 ; FB9.1@47.752,26.416 v1(48.768,26.416) ; v1(53.566,5.022) BC32.2@54.922,5.022 ; v1(55.334,20.536) BC27.2@55.334,21.717 ; BC28.2@56.051,23.368 BC30.2@56.051,24.892 v1(56.051,26.078) ; BC29.2@56.065,28.321 v1(56.065,29.533) ; v1(56.47,16.241) U11.17@58.131,16.241 ; OSC2.2@59.656,7.222 v1(61.104,7.222) ; U12.13@60.646,54.229 59.182,54.229 59.055,54.356 v1(59.055,55.499) U12.12@60.646,55.499 ; v1(63.881,47.117) BC37.2@64.828,47.117 ; v1(63.931,7.924) BC36.2@63.931,8.849 ; U11.2@63.931,12.341 65.129,12.341 65.448,12.022 C11.1@66.238,12.022 ; U11.5@63.931,14.291 65.338,14.291 65.575,14.054 C10.2@66.238,14.054 v1(66.886,14.054) ; U11.7@63.931,15.591 62.075,15.591 62.058,15.608 62.058,16.241 U11.8@63.931,16.241 ; U11.10@63.931,17.541 62.118,17.541 v1(62.103,17.526) 62.103,18.079 62.215,18.191 U11.11@63.931,18.191 ; U12.2@65.846,51.689 68.072,51.689 68.199,51.816 v1(68.199,52.959) U12.3@65.846,52.959 ; v1(66.238,11.105) C11.1@66.238,12.022 ; C12.1@66.871,16.891 v1(67.818,16.891) ; BC34.2@66.871,18.841 v1(67.818,18.841) ; R32.1@67.635,12.022 C11.1@66.238,12.022 ; U13.2@68.326,44.583 U13.3@69.276,44.583 v1(70.435,44.583) ; v1(69.019,20.262) BC31.2@70.241,20.262 ; v1(71.191,14.041) U10.2@71.191,14.905 ; v1(72.213,11.38) R23.1@72.213,12.276 ; C9.2@76.975,12.276 v1(77.659,12.276) ; C8.2@77.102,14.885 v1(77.795,14.885) ; C7.2@77.668,16.859 v1(79.153,16.859)
  Bottom Layer w0.254: v1(4.191,22.987) 4.191,23.598 BC23.2@4.884,24.291 4.944,24.351 v1(4.944,25.019) ; v1(4.388,77.286) R60.2@5.461,77.286 ; ZD1.1@4.531,53.721 v1(4.531,55.839) ; v1(6.984,77.413) R62.2@10.414,77.413 ; BC57.1@7.297,35.77 BC58.1@7.297,36.957 v1(7.297,38.042) ; U16.16@8.252,74.149 8.792,74.149 U16.21@9.281,73.66 ; R75.1@10.182,45.281 v1(12.124,45.281) ; U14.7@10.253,58.152 U14.9@10.253,60.291 ; v1(11.142,23.291) U6.4@11.142,25.894 ; R63.2@13.208,75.635 v1(13.208,76.327) ; FB10.1@13.97,43.307 v1(13.97,44.577) ; v1(14.547,65.075) R45.2@14.547,66.654 ; v1(15.02,27.525) 16.671,27.525 17.111,27.085 U7.4@17.111,25.894 17.69,25.894 18.339,26.543 ; v1(16.833,62.486) R46.2@16.833,63.74 ; BC46.2@18.288,46.914 BC48.2@20.706,46.914 v1(22.473,46.914) 22.569,46.818 BC7.2@24.219,46.818 ; R47.2@18.611,58.039 v1(18.611,58.986) ; BC45.2@19.119,52.07 BC44.2@19.119,53.086 20.701,53.086 ; Q1.2@19.166,66.354 v1(20.091,66.354) ; C20.1@20.706,54.483 20.706,53.091 20.701,53.086 ; v1(21.024,37.096) 21.902,37.096 C1.2@21.902,38.107 ; C21.1@22.675,55.753 23.368,55.06 v1(23.368,53.975) 22.479,53.086 20.701,53.086 ; v1(23.876,45.339) BC8.2@25.077,45.339 ; U8.4@24.477,26.348 v1(24.477,28.16) ; v1(25.146,57.15) BC51.2@26.19,57.15 BC52.2@26.19,56.134 ; v1(25.192,50.673) BC5.2@26.22,50.673 ; v1(25.203,51.943) BC6.2@26.22,51.943 ; BC10.2@26.093,38.1 BC11.2@26.093,39.116 v1(26.093,40.836) ; C6.2@27.62,30.006 v1(28.956,30.006) ; v1(30.319,27.144) U4.4@30.319,25.767 30.319,25.18 30.654,24.845 BC26.2@31.877,24.845 ; v1(30.803,49.61) BC2.2@30.803,48.387 v1(31.432,48.387) 31.661,48.158 BC1.2@31.661,46.99 ; v1(31.467,65.596) 32.166,66.295 D2.4@33.507,66.295 ; v1(31.623,62.738) 32.639,62.738 32.766,62.611 BC53.2@32.842,62.611 BC56.2@32.842,60.198 BC54.2@32.842,57.734 BC55.2@32.842,55.245 ; BC14.2@31.919,33.597 32.612,34.29 v1(34.387,34.29) ; BC18.2@31.919,42.095 31.919,42.073 v1(32.679,41.313) ; BC3.2@31.946,52.197 32.533,52.197 v1(33.549,51.181) ; BC13.2@32.015,37.583 BC12.2@32.015,38.608 v1(33.176,38.608) ; BC39.2@35.941,72.212 v1(35.941,73.66) ; BC15.2@36.391,33.089 v1(36.391,34.291) ; U9.4@37.177,25.767 37.177,26.856 v1(37.846,27.525) ; v1(37.387,41.217) BC17.2@37.387,42.349 ; v1(39.673,37.084) BC16.2@40.64,37.084 ; v1(41.74,71.247) 42.057,70.93 C17.2@43.18,70.93 ; v1(42.539,51.601) Q3.2@42.539,53.075 ; FB8.1@43.942,73.406 J2.2@43.942,75.946 ; U5.4@44.416,26.348 v1(44.416,28.355) ; v1(45.986,51.804) Q4.2@45.986,53.075 ; v1(46.736,66.929) C18.2@47.757,66.929 ; v1(48.717,57.963) BC42.2@48.717,59.817 ; BC38.2@59.055,54.552 v1(59.055,55.499) ; v1(61.018,12.725) BC35.2@61.018,13.641 ; BC33.2@61.438,15.591 v1(62.23,15.591)
  other v1: 9.929,60.403 11.811,60.403 9.929,61.595 11.811,61.595 41.783,62.23 43.307,62.23 41.783,64.135 43.307,64.135 9.281,72.136 9.652,72.898 10.033,73.649
GTX_CLK: C30.1 R2.2 R4.1 R97.2 U1.8 | length 6.7
  Top Layer w0.254: C30.1@34.682,26.543 R4.1@34.682,27.755 R97.2@35.883,27.755 35.887,27.759 U1.8@35.887,32.046
HSI_N: C2.2 C29.1 | length 9.6
  Top Layer w0.254: C29.1@18.297,34.417 18.677,34.417 18.958,34.136 19.785,34.136 21.852,36.203 21.852,38.844 22.672,39.663 23.095,39.663 23.376,39.944 C2.2@23.876,39.944
HSI_P: C3.2 C28.1 | length 9.7
  Top Layer w0.254: C28.1@18.297,33.401 18.677,33.401 18.958,33.682 19.984,33.682 22.306,36.004 22.306,38.656 22.86,39.209 23.095,39.209 23.376,38.928 C3.2@23.876,38.928
HSIX_N: C2.1 R6.1 U1.53 | length 6.7
  Top Layer w0.254: R6.1@24.776,40.96 C2.1@24.776,39.944 25.154,39.944 25.435,39.663 27.337,39.663 27.405,39.596 U1.53@30.337,39.596
HSIX_P: C3.1 R7.2 U1.54 | length 6.7
  Top Layer w0.254: R7.2@24.776,37.912 C3.1@24.776,38.928 25.154,38.928 25.435,39.209 27.149,39.209 27.262,39.096 U1.54@30.337,39.096
HSO_N: C4.2 C26.1 | length 4.3
  Top Layer w0.254: C26.1@23.187,30.71 23.63,30.71 23.915,30.425 25.26,30.425 25.873,31.038 25.873,31.498 25.588,31.783 C4.2@25.588,32.189
HSO_P: C5.2 C27.1 | length 5.1
  Top Layer w0.254: C27.1@23.187,29.686 23.63,29.686 23.915,29.971 25.448,29.971 26.327,30.85 26.327,31.498 26.612,31.783 C5.2@26.612,32.189
HSOX_N: C4.1 R9.1 U1.59 | length 8.3
  Top Layer w0.254: R9.1@24.572,33.089 C4.1@25.588,33.089 25.588,33.561 25.873,33.846 25.873,35.271 27.198,36.596 U1.59@30.337,36.596
HSOX_P: C5.1 R10.2 U1.60 | length 7.5
  Top Layer w0.254: R10.2@27.62,33.089 C5.1@26.612,33.089 26.612,33.561 26.327,33.846 26.327,35.06 27.363,36.096 U1.60@30.337,36.096
LCKREFEN: R87.2 S1.5 U1.25 | length 23.2
  Top Layer w0.2: U1.25@41.937,38.096 46.935,38.096 v1(47.186,38.347) 49.606,35.927 59.45,35.927 S1.5@62.23,33.147
  Bottom Layer w0.2: v1(47.186,38.347) R87.2@47.815,38.347
LOOP_EN: R88.2 S1.2 U1.21 | length 14.5
  Top Layer w0.2: U1.21@41.937,36.096 42.967,36.096 43.736,35.327 v1(47.186,35.327) 47.786,34.727 53.03,34.727 S1.2@54.61,33.147
  Bottom Layer w0.2: v1(47.186,35.327) R88.2@47.815,35.327
N16724910: R58.2 R60.1 U16.15 | length 5
  Bottom Layer w0.2: R60.1@5.461,76.386 R58.2@5.461,75.254 6.28,75.254 6.604,74.93 6.604,74.295 7.25,73.649 U16.15@8.252,73.649
N16724920: R56.2 R58.1 U16.14 | length 4
  Bottom Layer w0.2: R58.1@5.461,74.354 5.461,73.222 5.534,73.149 U16.14@8.252,73.149
N16725009: C25.2 U16.18 | length 1.7
  Bottom Layer w0.2: U16.18@9.402,74.799 C25.2@9.402,76.509
N16725178: R61.1 U16.17 | length 1.9
  Bottom Layer w0.2: R61.1@8.382,76.513 8.382,75.946 8.902,75.426 U16.17@8.902,74.799
N16725203: R62.1 U16.19 | length 1.9
  Bottom Layer w0.2: U16.19@9.902,74.799 9.902,75.403 10.414,75.915 R62.1@10.414,76.513
N16726954: C15.2 R39.2 | length 1.5
  Bottom Layer w0.254: C15.2@37.122,59.817 R39.2@38.619,59.817
N16727102: BC42.1 R41.1 | length 2
  Bottom Layer w0.254: R41.1@43.472,59.817 BC42.1@45.517,59.817